# EAGLE board SparkFun_RedStick-ProtoPanel-v01 (EAGLE 7.4.0), part 1 of 4
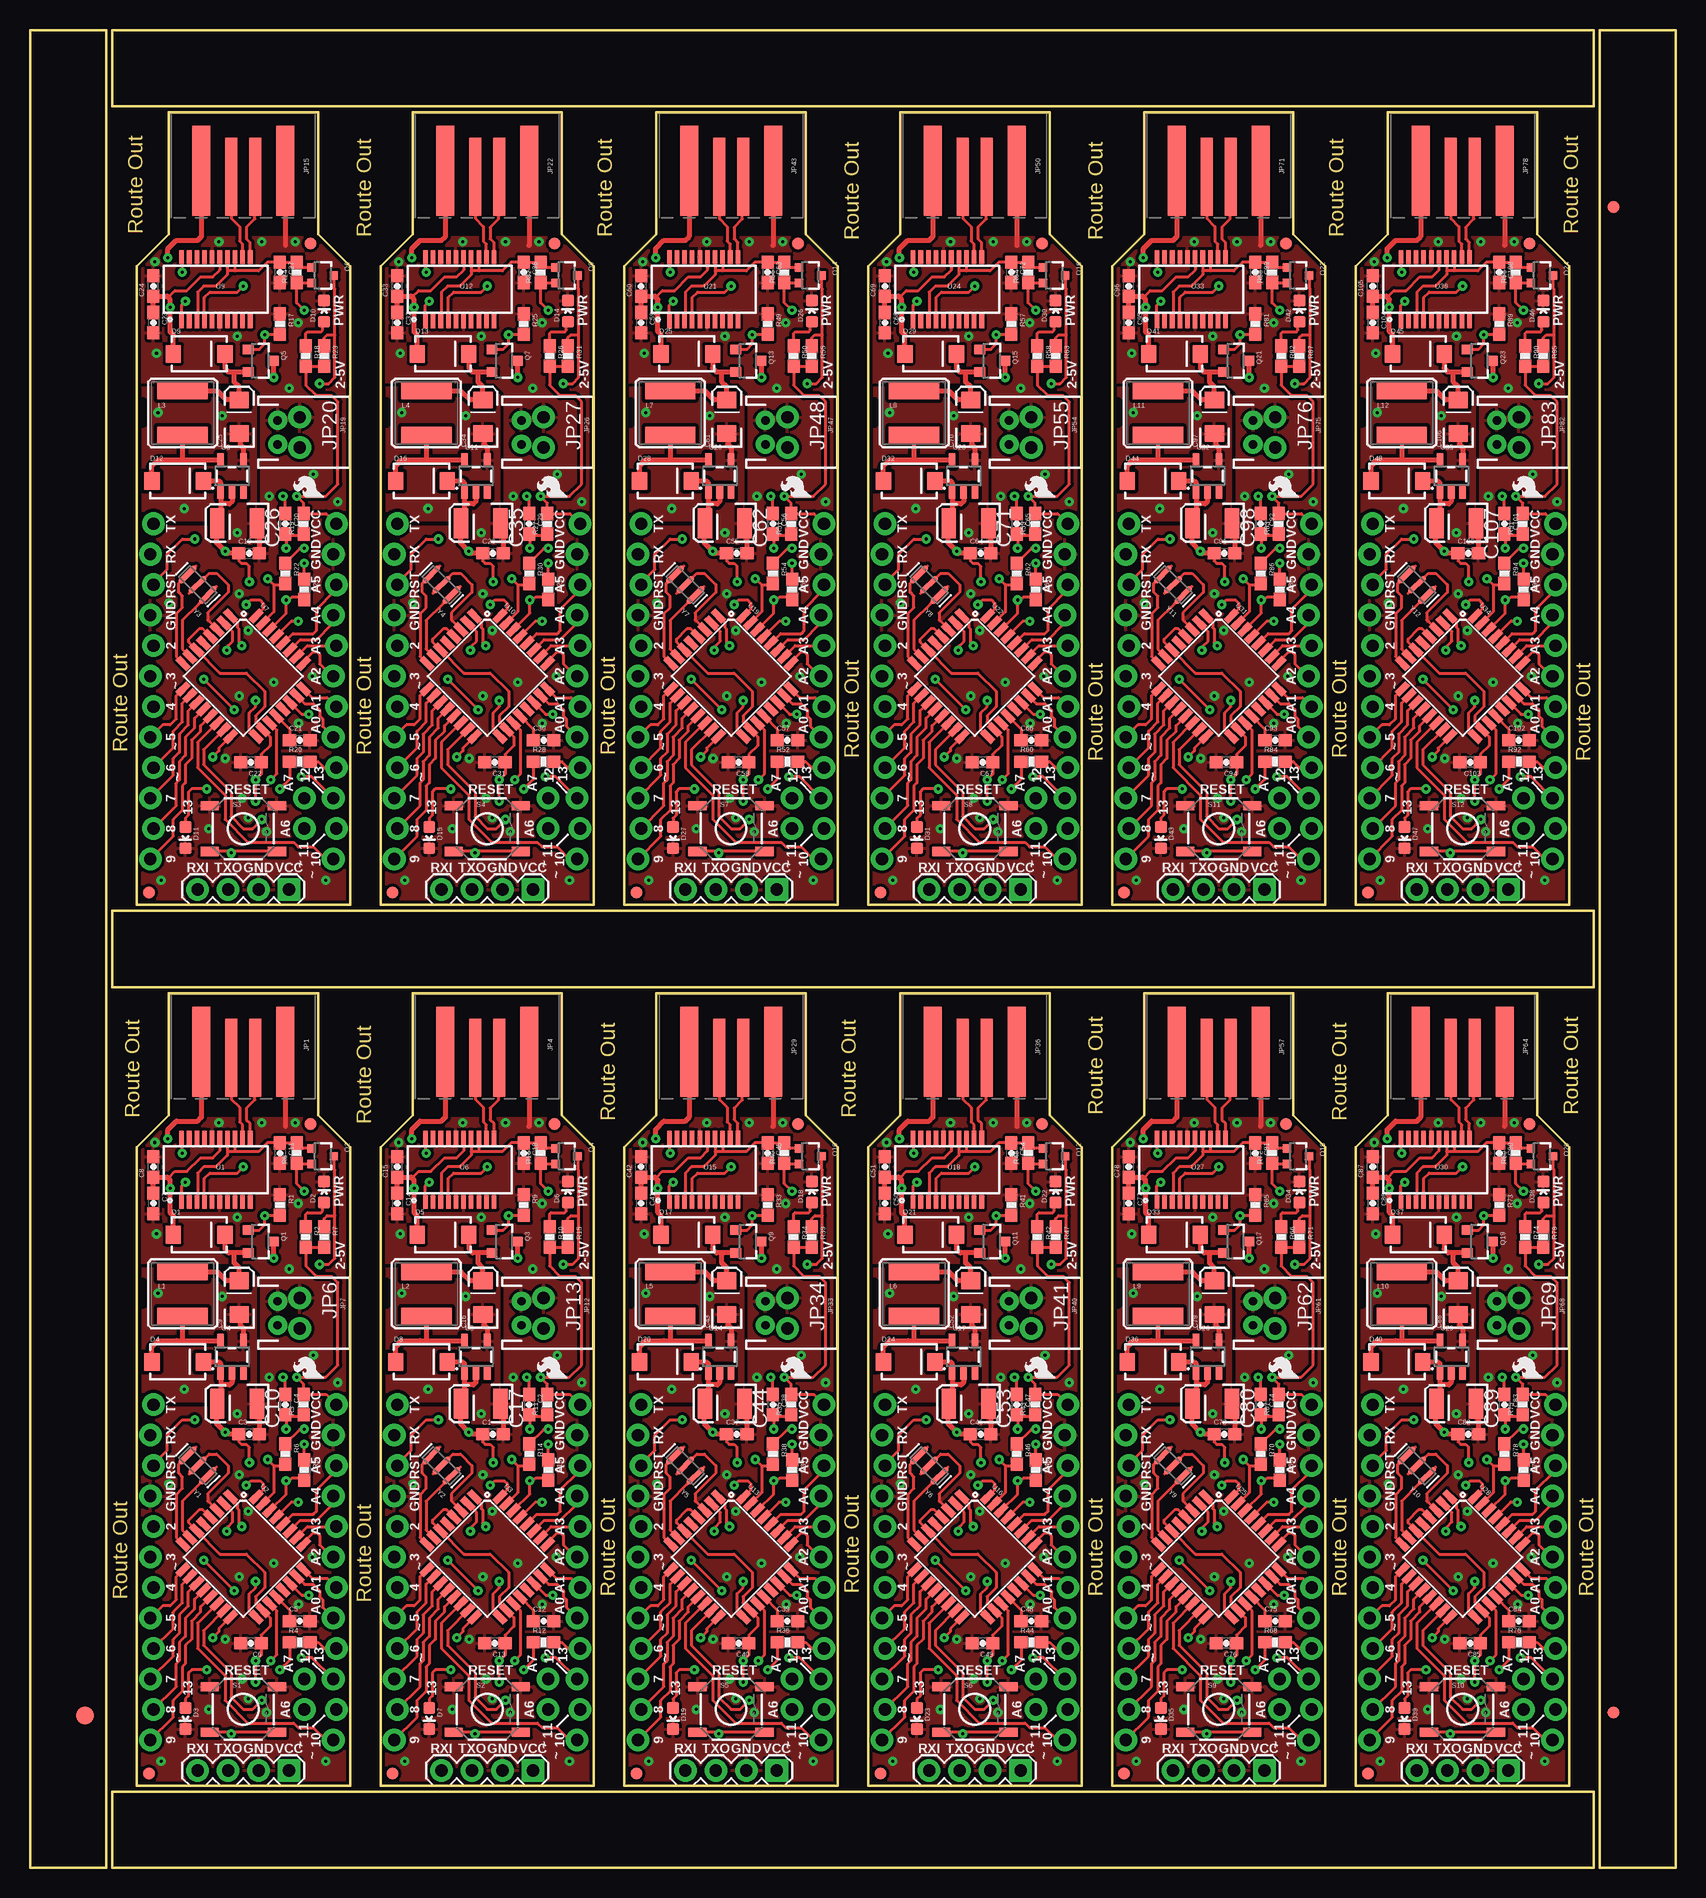
[diagram p0: board, top side]
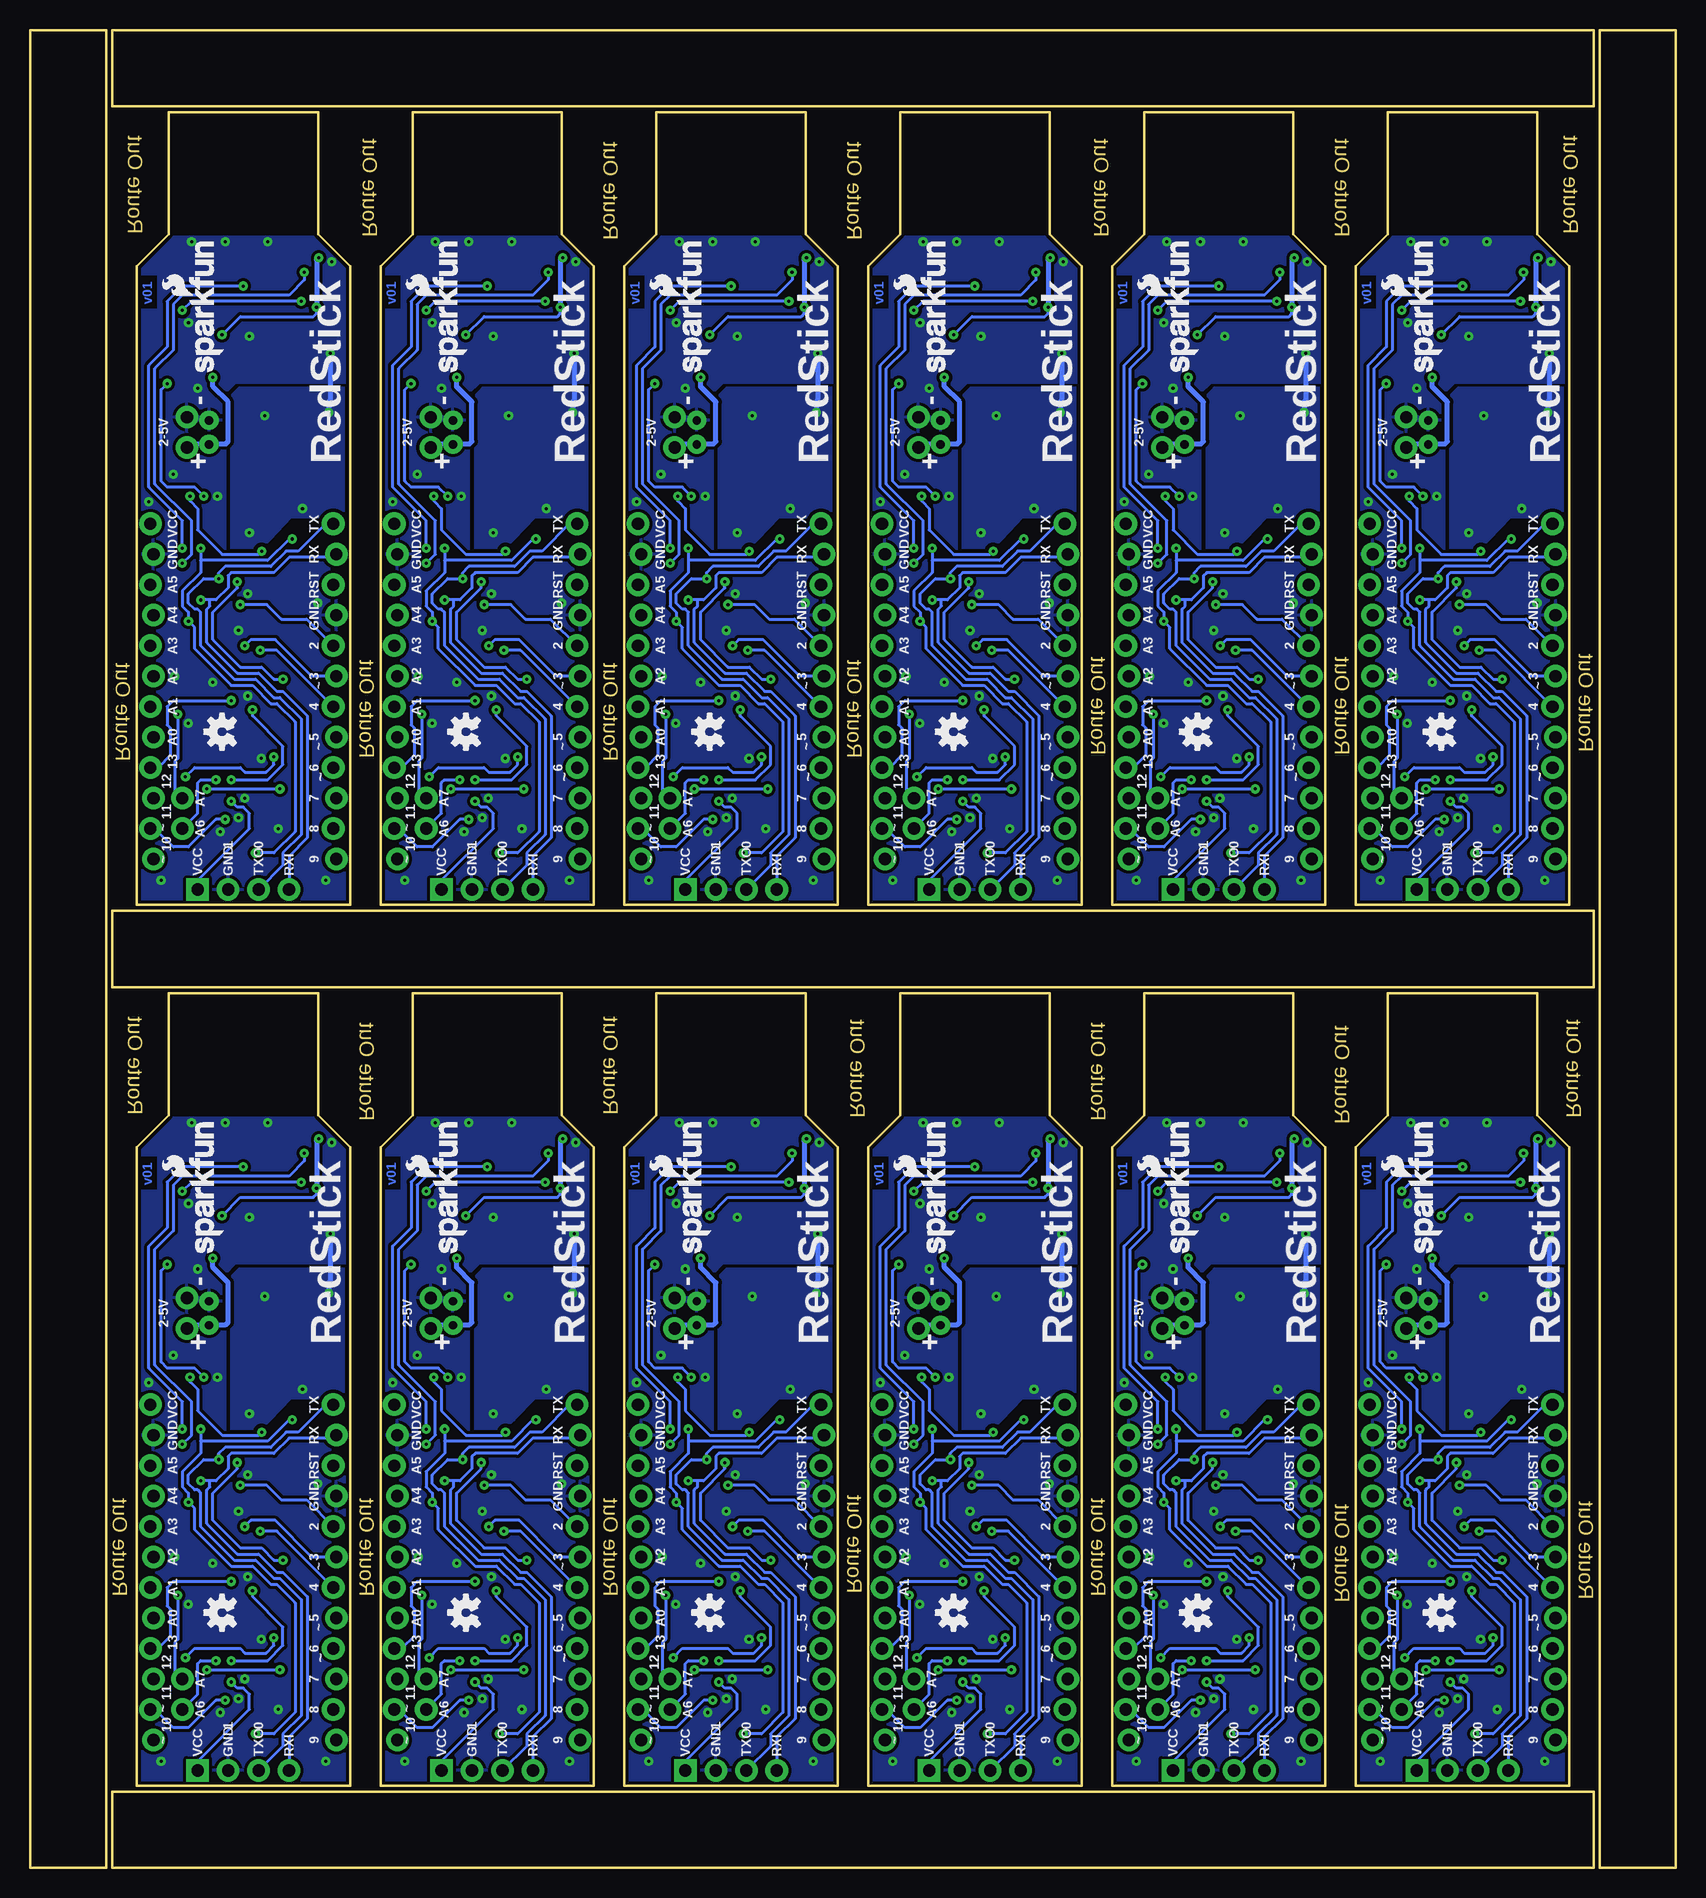
[diagram p1: board, bottom side, seen from below]

Size 137.16 x 153.16 mm. Coordinates in mm from the lower left corner, seen from the top.
Outline: 83.82,73.41 6.86,73.41 6.86,79.76 34.29,79.76
Outline: 31.75,79.76 130.3,79.76 130.3,73.41 81.28,73.41
Outline: 6.35,79.25 6.35,0 0,0 0,29.72
Outline: 0,27.18 0,153.16 6.35,153.16 6.35,76.71
Outline: 81.28,0 6.86,0 6.86,6.35 31.75,6.35
Outline: 29.21,6.35 130.3,6.35 130.3,0 78.74,0
Outline: 137.16,79.25 137.16,0 130.81,0 130.81,29.72
Outline: 130.81,27.18 130.81,153.16 137.16,153.16 137.16,76.71
Outline: 53.09,153.16 130.3,153.16 130.3,146.81 102.62,146.81
Outline: 105.16,146.81 6.86,146.81 6.86,153.16 55.63,153.16
Outline: 8.89,6.86 26.67,6.86 26.67,60.07 24,62.74 24,72.9 11.56,72.9 11.56,62.74 8.89,60.07 8.89,6.86
Outline: 29.21,6.86 46.99,6.86 46.99,60.07 44.32,62.74 44.32,72.9 31.88,72.9 31.88,62.74 29.21,60.07 29.21,6.86
Outline: 8.89,80.26 26.67,80.26 26.67,133.48 24,136.14 24,146.3 11.56,146.3 11.56,136.14 8.89,133.48 8.89,80.26
Outline: 29.21,80.26 46.99,80.26 46.99,133.48 44.32,136.14 44.32,146.3 31.88,146.3 31.88,136.14 29.21,133.48 29.21,80.26
Outline: 49.53,6.86 67.31,6.86 67.31,60.07 64.64,62.74 64.64,72.9 52.2,72.9 52.2,62.74 49.53,60.07 49.53,6.86
Outline: 69.85,6.86 87.63,6.86 87.63,60.07 84.96,62.74 84.96,72.9 72.52,72.9 72.52,62.74 69.85,60.07 69.85,6.86
Outline: 49.53,80.26 67.31,80.26 67.31,133.48 64.64,136.14 64.64,146.3 52.2,146.3 52.2,136.14 49.53,133.48 49.53,80.26
Outline: 69.85,80.26 87.63,80.26 87.63,133.48 84.96,136.14 84.96,146.3 72.52,146.3 72.52,136.14 69.85,133.48 69.85,80.26
Outline: 90.17,6.86 107.95,6.86 107.95,60.07 105.28,62.74 105.28,72.9 92.84,72.9 92.84,62.74 90.17,60.07 90.17,6.86
Outline: 110.49,6.86 128.27,6.86 128.27,60.07 125.6,62.74 125.6,72.9 113.16,72.9 113.16,62.74 110.49,60.07 110.49,6.86
Outline: 90.17,80.26 107.95,80.26 107.95,133.48 105.28,136.14 105.28,146.3 92.84,146.3 92.84,136.14 90.17,133.48 90.17,80.26
Outline: 110.49,80.26 128.27,80.26 128.27,133.48 125.6,136.14 125.6,146.3 113.16,146.3 113.16,136.14 110.49,133.48 110.49,80.26
Copper layers (1*16): Top 0.035mm / dielectric 1.5mm / Bottom 0.035mm
Design rules "SparkFun-2-layer": minimum track width 7mil, minimum drill 15mil, track to track 8mil, track to pad 8mil, pad to pad 8mil, via to via 8mil, smd to smd 8mil, copper to edge 8mil, drill to drill 8mil, minimum pad ring 12mil, minimum via ring 10mil, stop-mask expansion 4mil, vias tented up to drill 20mil, thermal gap 10mil
tRestrict: 72 lines

## Footprints (pad centres in the part's own frame; a part is rotated, then mirrored left to right if it is on the bottom)
0603-CAP = smd 1.1 x 1: 1 -0.85,0; 2 0.85,0
EIA3216 = smd 1.4 x 1.6: A 1.4,0; C -1.4,0
EIA3528 = smd 1.2 x 2.5: A 1.65,0; C -1.65,0
SMA-DIODE = smd 1.27 x 1.47: A -2.15,0; C 2.15,0
LED-0603 = smd 1 x 1: A 0,-0.877; C 0,0.877
FIDUCIAL-1.5X3 = smd 1.5 x 1.5: 1 0,0
FIDUCIAL-1X2 = smd 1 x 1: 1 0,0
USB-A-PCB-NOPASTE = smd 7.5 x 1.5: 5V -0.2,-3.5; GND -0.2,3.5 | smd 6.5 x 1: USB_M 0.3,-1; USB_P 0.3,1
1X12_LOCK_NO_SILK = drill 1.016 pad 1.88: 1 0,0.127; 2 2.54,-0.127; 3 5.08,0.127; 4 7.62,-0.127; 5 10.16,0.127; 6 12.7,-0.127; 7 15.24,0.127; 8 17.78,-0.127; 9 20.32,0.127; 10 22.86,-0.127; 11 25.4,0.127; 12 27.94,-0.127
1X02_NO_SILK = drill 1.016 pad 1.88: 1 0,0; 2 2.54,0
JST-2-PTH = drill 0.7 pad 1.6: 1 -1,0; 2 1,0
1X04 = drill 1.016 pad 1.88 square: 1 0,0 | drill 1.016 pad 1.88: 2 2.54,0; 3 5.08,0; 4 7.62,0
CR54 = smd 4.2 x 1.4: P$1 0,1.85; P$2 0,-1.85
SOT23-3 = smd 0.8 x 0.9: 1 -0.95,-1; 2 0.95,-1; 3 0,1.1
SOT323 = smd 0.7 x 0.7: 1 -0.65,-0.925; 2 0.65,-0.925; 3 0,0.925
0603-RES = smd 1.1 x 1: 1 -0.85,0; 2 0.85,0
TACTILE-SWITCH-SMD = smd 1.524 x 0.762: 1 -2.794,1.905; 2 2.794,1.905; 3 -2.794,-1.905; 4 2.794,-1.905
SSOP20_L = smd 0.381 x 1.143: 1 -2.857,-2.68; 2 -2.223,-2.68; 3 -1.587,-2.68; 4 -0.953,-2.68; 5 -0.318,-2.68; 6 0.318,-2.68; 7 0.953,-2.68; 8 1.587,-2.68; 9 2.223,-2.68; 10 2.857,-2.68; 11 2.857,2.68; 12 2.223,2.68; 13 1.587,2.68; 14 0.953,2.68; 15 0.318,2.68; 16 -0.318,2.68; 17 -0.953,2.68; 18 -1.587,2.68; 19 -2.223,2.68; 20 -2.857,2.68
TQFP32-08 = smd 1.27 x 0.559: 1 -4.293,2.8; 2 -4.293,2; 3 -4.293,1.2; 4 -4.293,0.4; 5 -4.293,-0.4; 6 -4.293,-1.2; 7 -4.293,-2; 8 -4.293,-2.8; 17 4.293,-2.8; 18 4.293,-2; 19 4.293,-1.2; 20 4.293,-0.4; 21 4.293,0.4; 22 4.293,1.2; 23 4.293,2; 24 4.293,2.8 | smd 0.559 x 1.27: 9 -2.8,-4.293; 10 -2,-4.293; 11 -1.2,-4.293; 12 -0.4,-4.293; 13 0.4,-4.293; 14 1.2,-4.293; 15 2,-4.293; 16 2.8,-4.293; 25 2.8,4.293; 26 2,4.293; 27 1.2,4.293; 28 0.4,4.293; 29 -0.4,4.293; 30 -1.2,4.293; 31 -2,4.293; 32 -2.8,4.293
SOT23-5 = smd 0.55 x 1.2: 1 -0.95,-1.3; 2 0,-1.3; 3 0.95,-1.3; 4 0.95,1.3; 5 -0.95,1.3
RESONATOR-SMD = smd 0.45 x 1.905: 1 -1.2,0; 2 0,0; 3 1.2,0

## Placement (x,y rotation side)
C1  0.1uF  [0603-CAP]  38.58,36.15 0 top
C2  0.1uF  [0603-CAP]  41.59,38.61 270 top
C3  0.1uF  [0603-CAP]  18.26,36.15 0 top
C4  0.1uF  [0603-CAP]  21.27,38.61 270 top
C5  0.1uF  [0603-CAP]  22.48,20.57 0 top
C6  0.1uF  [0603-CAP]  18.41,18.73 180 top
C7  0.1uF  [0603-CAP]  10.29,55.37 270 top
C8  0.1uF  [0603-CAP]  10.29,58.42 90 top
C9  10uF  [EIA3216]  17.43,47.53 90 top
C10  68uF  [EIA3528]  17.25,38.67 180 top
C11  0.1uF  [0603-CAP]  20.83,59.56 270 top
C12  0.1uF  [0603-CAP]  42.8,20.57 0 top
C13  0.1uF  [0603-CAP]  38.73,18.73 180 top
C14  0.1uF  [0603-CAP]  30.61,55.37 270 top
C15  0.1uF  [0603-CAP]  30.61,58.42 90 top
C16  10uF  [EIA3216]  37.75,47.53 90 top
C17  68uF  [EIA3528]  37.57,38.67 180 top
C18  0.1uF  [0603-CAP]  41.15,59.56 270 top
C19  0.1uF  [0603-CAP]  18.26,109.55 0 top
C20  0.1uF  [0603-CAP]  21.27,112.01 270 top
C21  0.1uF  [0603-CAP]  22.48,93.98 0 top
C22  0.1uF  [0603-CAP]  18.41,92.14 180 top
C23  0.1uF  [0603-CAP]  10.29,128.78 270 top
C24  0.1uF  [0603-CAP]  10.29,131.83 90 top
C25  10uF  [EIA3216]  17.43,120.93 90 top
C26  68uF  [EIA3528]  17.25,112.08 180 top
C27  0.1uF  [0603-CAP]  20.83,132.97 270 top
C28  0.1uF  [0603-CAP]  38.58,109.55 0 top
C29  0.1uF  [0603-CAP]  41.59,112.01 270 top
C30  0.1uF  [0603-CAP]  42.8,93.98 0 top
C31  0.1uF  [0603-CAP]  38.73,92.14 180 top
C32  0.1uF  [0603-CAP]  30.61,128.78 270 top
C33  0.1uF  [0603-CAP]  30.61,131.83 90 top
C34  10uF  [EIA3216]  37.75,120.93 90 top
C35  68uF  [EIA3528]  37.57,112.08 180 top
C36  0.1uF  [0603-CAP]  41.15,132.97 270 top
C37  0.1uF  [0603-CAP]  58.9,36.15 0 top
C38  0.1uF  [0603-CAP]  61.91,38.61 270 top
C39  0.1uF  [0603-CAP]  63.12,20.57 0 top
C40  0.1uF  [0603-CAP]  59.05,18.73 180 top
C41  0.1uF  [0603-CAP]  50.93,55.37 270 top
C42  0.1uF  [0603-CAP]  50.93,58.42 90 top
C43  10uF  [EIA3216]  58.07,47.53 90 top
C44  68uF  [EIA3528]  57.89,38.67 180 top
C45  0.1uF  [0603-CAP]  61.47,59.56 270 top
C46  0.1uF  [0603-CAP]  79.22,36.15 0 top
C47  0.1uF  [0603-CAP]  82.23,38.61 270 top
C48  0.1uF  [0603-CAP]  83.44,20.57 0 top
C49  0.1uF  [0603-CAP]  79.38,18.73 180 top
C50  0.1uF  [0603-CAP]  71.25,55.37 270 top
C51  0.1uF  [0603-CAP]  71.25,58.42 90 top
C52  10uF  [EIA3216]  78.39,47.53 90 top
C53  68uF  [EIA3528]  78.21,38.67 180 top
C54  0.1uF  [0603-CAP]  81.79,59.56 270 top
C55  0.1uF  [0603-CAP]  58.9,109.55 0 top
C56  0.1uF  [0603-CAP]  61.91,112.01 270 top
C57  0.1uF  [0603-CAP]  63.12,93.98 0 top
C58  0.1uF  [0603-CAP]  59.05,92.14 180 top
C59  0.1uF  [0603-CAP]  50.93,128.78 270 top
C60  0.1uF  [0603-CAP]  50.93,131.83 90 top
C61  10uF  [EIA3216]  58.07,120.93 90 top
C62  68uF  [EIA3528]  57.89,112.08 180 top
C63  0.1uF  [0603-CAP]  61.47,132.97 270 top
C64  0.1uF  [0603-CAP]  79.22,109.55 0 top
C65  0.1uF  [0603-CAP]  82.23,112.01 270 top
C66  0.1uF  [0603-CAP]  83.44,93.98 0 top
C67  0.1uF  [0603-CAP]  79.38,92.14 180 top
C68  0.1uF  [0603-CAP]  71.25,128.78 270 top
C69  0.1uF  [0603-CAP]  71.25,131.83 90 top
C70  10uF  [EIA3216]  78.39,120.93 90 top
C71  68uF  [EIA3528]  78.21,112.08 180 top
C72  0.1uF  [0603-CAP]  81.79,132.97 270 top
C73  0.1uF  [0603-CAP]  99.54,36.15 0 top
C74  0.1uF  [0603-CAP]  102.55,38.61 270 top
C75  0.1uF  [0603-CAP]  103.76,20.57 0 top
C76  0.1uF  [0603-CAP]  99.69,18.73 180 top
C77  0.1uF  [0603-CAP]  91.57,55.37 270 top
C78  0.1uF  [0603-CAP]  91.57,58.42 90 top
C79  10uF  [EIA3216]  98.71,47.53 90 top
C80  68uF  [EIA3528]  98.53,38.67 180 top
C81  0.1uF  [0603-CAP]  102.11,59.56 270 top
C82  0.1uF  [0603-CAP]  119.86,36.15 0 top
C83  0.1uF  [0603-CAP]  122.87,38.61 270 top
C84  0.1uF  [0603-CAP]  124.08,20.57 0 top
C85  0.1uF  [0603-CAP]  120.02,18.73 180 top
C86  0.1uF  [0603-CAP]  111.89,55.37 270 top
C87  0.1uF  [0603-CAP]  111.89,58.42 90 top
C88  10uF  [EIA3216]  119.03,47.53 90 top
C89  68uF  [EIA3528]  118.85,38.67 180 top
C90  0.1uF  [0603-CAP]  122.43,59.56 270 top
C91  0.1uF  [0603-CAP]  99.54,109.55 0 top
C92  0.1uF  [0603-CAP]  102.55,112.01 270 top
C93  0.1uF  [0603-CAP]  103.76,93.98 0 top
C94  0.1uF  [0603-CAP]  99.69,92.14 180 top
C95  0.1uF  [0603-CAP]  91.57,128.78 270 top
C96  0.1uF  [0603-CAP]  91.57,131.83 90 top
C97  10uF  [EIA3216]  98.71,120.93 90 top
C98  68uF  [EIA3528]  98.53,112.08 180 top
C99  0.1uF  [0603-CAP]  102.11,132.97 270 top
C100  0.1uF  [0603-CAP]  119.86,109.55 0 top
C101  0.1uF  [0603-CAP]  122.87,112.01 270 top
C102  0.1uF  [0603-CAP]  124.08,93.98 0 top
C103  0.1uF  [0603-CAP]  120.02,92.14 180 top
C104  0.1uF  [0603-CAP]  111.89,128.78 270 top
C105  0.1uF  [0603-CAP]  111.89,131.83 90 top
C106  10uF  [EIA3216]  119.03,120.93 90 top
C107  68uF  [EIA3528]  118.85,112.08 180 top
C108  0.1uF  [0603-CAP]  122.43,132.97 270 top
D1  MBRA140  [SMA-DIODE]  14.1,52.77 0 top
D2  RED  [LED-0603]  24.51,56.32 0 top
D3  GREEN  [LED-0603]  12.95,12.45 180 top
D4  MBRA140  [SMA-DIODE]  12.31,42.17 0 top
D5  MBRA140  [SMA-DIODE]  34.42,52.77 0 top
D6  RED  [LED-0603]  44.83,56.32 0 top
D7  GREEN  [LED-0603]  33.27,12.45 180 top
D8  MBRA140  [SMA-DIODE]  32.63,42.17 0 top
D9  MBRA140  [SMA-DIODE]  14.1,126.17 0 top
D10  RED  [LED-0603]  24.51,129.73 0 top
D11  GREEN  [LED-0603]  12.95,85.85 180 top
D12  MBRA140  [SMA-DIODE]  12.31,115.58 0 top
D13  MBRA140  [SMA-DIODE]  34.42,126.17 0 top
D14  RED  [LED-0603]  44.83,129.73 0 top
D15  GREEN  [LED-0603]  33.27,85.85 180 top
D16  MBRA140  [SMA-DIODE]  32.63,115.58 0 top
D17  MBRA140  [SMA-DIODE]  54.74,52.77 0 top
D18  RED  [LED-0603]  65.15,56.32 0 top
D19  GREEN  [LED-0603]  53.59,12.45 180 top
D20  MBRA140  [SMA-DIODE]  52.95,42.17 0 top
D21  MBRA140  [SMA-DIODE]  75.06,52.77 0 top
D22  RED  [LED-0603]  85.47,56.32 0 top
D23  GREEN  [LED-0603]  73.91,12.45 180 top
D24  MBRA140  [SMA-DIODE]  73.27,42.17 0 top
D25  MBRA140  [SMA-DIODE]  54.74,126.17 0 top
D26  RED  [LED-0603]  65.15,129.73 0 top
D27  GREEN  [LED-0603]  53.59,85.85 180 top
D28  MBRA140  [SMA-DIODE]  52.95,115.58 0 top
D29  MBRA140  [SMA-DIODE]  75.06,126.17 0 top
D30  RED  [LED-0603]  85.47,129.73 0 top
D31  GREEN  [LED-0603]  73.91,85.85 180 top
D32  MBRA140  [SMA-DIODE]  73.27,115.58 0 top
D33  MBRA140  [SMA-DIODE]  95.38,52.77 0 top
D34  RED  [LED-0603]  105.79,56.32 0 top
D35  GREEN  [LED-0603]  94.23,12.45 180 top
D36  MBRA140  [SMA-DIODE]  93.59,42.17 0 top
D37  MBRA140  [SMA-DIODE]  115.7,52.77 0 top
D38  RED  [LED-0603]  126.11,56.32 0 top
D39  GREEN  [LED-0603]  114.55,12.45 180 top
D40  MBRA140  [SMA-DIODE]  113.91,42.17 0 top
D41  MBRA140  [SMA-DIODE]  95.38,126.17 0 top
D42  RED  [LED-0603]  105.79,129.73 0 top
D43  GREEN  [LED-0603]  94.23,85.85 180 top
D44  MBRA140  [SMA-DIODE]  93.59,115.58 0 top
D45  MBRA140  [SMA-DIODE]  115.7,126.17 0 top
D46  RED  [LED-0603]  126.11,129.73 0 top
D47  GREEN  [LED-0603]  114.55,85.85 180 top
D48  MBRA140  [SMA-DIODE]  113.91,115.58 0 top
E$1  [FIDUCIAL-1.5X3]  4.57,12.7 0 top
E$7  [FIDUCIAL-1X2]  131.95,12.95 0 top
E$8  [FIDUCIAL-1X2]  131.95,138.43 180 top
FID1  FIDUCIAL1X2  [FIDUCIAL-1X2]  9.91,7.87 0 top
FID2  FIDUCIAL1X2  [FIDUCIAL-1X2]  23.37,61.98 0 top
FID3  FIDUCIAL1X2  [FIDUCIAL-1X2]  30.23,7.87 0 top
FID4  FIDUCIAL1X2  [FIDUCIAL-1X2]  43.69,61.98 0 top
FID5  FIDUCIAL1X2  [FIDUCIAL-1X2]  9.91,81.28 0 top
FID6  FIDUCIAL1X2  [FIDUCIAL-1X2]  23.37,135.38 0 top
FID7  FIDUCIAL1X2  [FIDUCIAL-1X2]  30.23,81.28 0 top
FID8  FIDUCIAL1X2  [FIDUCIAL-1X2]  43.69,135.38 0 top
FID9  FIDUCIAL1X2  [FIDUCIAL-1X2]  50.55,7.87 0 top
FID10  FIDUCIAL1X2  [FIDUCIAL-1X2]  64.01,61.98 0 top
FID11  FIDUCIAL1X2  [FIDUCIAL-1X2]  70.87,7.87 0 top
FID12  FIDUCIAL1X2  [FIDUCIAL-1X2]  84.33,61.98 0 top
FID13  FIDUCIAL1X2  [FIDUCIAL-1X2]  50.55,81.28 0 top
FID14  FIDUCIAL1X2  [FIDUCIAL-1X2]  64.01,135.38 0 top
FID15  FIDUCIAL1X2  [FIDUCIAL-1X2]  70.87,81.28 0 top
FID16  FIDUCIAL1X2  [FIDUCIAL-1X2]  84.33,135.38 0 top
FID17  FIDUCIAL1X2  [FIDUCIAL-1X2]  91.19,7.87 0 top
FID18  FIDUCIAL1X2  [FIDUCIAL-1X2]  104.65,61.98 0 top
FID19  FIDUCIAL1X2  [FIDUCIAL-1X2]  111.51,7.87 0 top
FID20  FIDUCIAL1X2  [FIDUCIAL-1X2]  124.97,61.98 0 top
FID21  FIDUCIAL1X2  [FIDUCIAL-1X2]  91.19,81.28 0 top
FID22  FIDUCIAL1X2  [FIDUCIAL-1X2]  104.65,135.38 0 top
FID23  FIDUCIAL1X2  [FIDUCIAL-1X2]  111.51,81.28 0 top
FID24  FIDUCIAL1X2  [FIDUCIAL-1X2]  124.97,135.38 0 top
JP1  USBPCB_NOPASTE  [USB-A-PCB-NOPASTE]  17.78,67.82 270 top
JP2  DNP  [1X12_LOCK_NO_SILK]  10.16,10.67 90 top
JP3  DNP  [1X12_LOCK_NO_SILK]  25.4,38.61 270 top
JP4  USBPCB_NOPASTE  [USB-A-PCB-NOPASTE]  38.1,67.82 270 top
JP5  M021X02_NO_SILK  [1X02_NO_SILK]  22.86,13.21 90 top
JP6  M021X02_NO_SILK  [1X02_NO_SILK]  22.48,47.5 270 top
JP7  DNP  [JST-2-PTH]  20.64,46.23 270 top
JP8  DNP  [1X04]  21.59,8.13 180 top
JP9  M021X02_NO_SILK  [1X02_NO_SILK]  43.18,13.21 90 top
JP10  DNP  [1X12_LOCK_NO_SILK]  45.72,38.61 270 top
JP11  DNP  [1X12_LOCK_NO_SILK]  30.48,10.67 90 top
JP12  DNP  [JST-2-PTH]  40.96,46.23 270 top
JP13  M021X02_NO_SILK  [1X02_NO_SILK]  42.8,47.5 270 top
JP14  DNP  [1X04]  41.91,8.13 180 top
JP15  USBPCB_NOPASTE  [USB-A-PCB-NOPASTE]  17.78,141.22 270 top
JP16  M021X02_NO_SILK  [1X02_NO_SILK]  22.86,86.61 90 top
JP17  DNP  [1X12_LOCK_NO_SILK]  25.4,112.01 270 top
JP18  DNP  [1X12_LOCK_NO_SILK]  10.16,84.07 90 top
JP19  DNP  [JST-2-PTH]  20.64,119.63 270 top
JP20  M021X02_NO_SILK  [1X02_NO_SILK]  22.48,120.9 270 top
JP21  DNP  [1X04]  21.59,81.53 180 top
JP22  USBPCB_NOPASTE  [USB-A-PCB-NOPASTE]  38.1,141.22 270 top
JP23  M021X02_NO_SILK  [1X02_NO_SILK]  43.18,86.61 90 top
JP24  DNP  [1X12_LOCK_NO_SILK]  45.72,112.01 270 top
JP25  DNP  [1X12_LOCK_NO_SILK]  30.48,84.07 90 top
JP26  DNP  [JST-2-PTH]  40.96,119.63 270 top
JP27  M021X02_NO_SILK  [1X02_NO_SILK]  42.8,120.9 270 top
JP28  DNP  [1X04]  41.91,81.53 180 top
JP29  USBPCB_NOPASTE  [USB-A-PCB-NOPASTE]  58.42,67.82 270 top
JP30  M021X02_NO_SILK  [1X02_NO_SILK]  63.5,13.21 90 top
JP31  DNP  [1X12_LOCK_NO_SILK]  66.04,38.61 270 top
JP32  DNP  [1X12_LOCK_NO_SILK]  50.8,10.67 90 top
JP33  DNP  [JST-2-PTH]  61.28,46.23 270 top
JP34  M021X02_NO_SILK  [1X02_NO_SILK]  63.12,47.5 270 top
JP35  DNP  [1X04]  62.23,8.13 180 top
JP36  USBPCB_NOPASTE  [USB-A-PCB-NOPASTE]  78.74,67.82 270 top
JP37  M021X02_NO_SILK  [1X02_NO_SILK]  83.82,13.21 90 top
JP38  DNP  [1X12_LOCK_NO_SILK]  86.36,38.61 270 top
JP39  DNP  [1X12_LOCK_NO_SILK]  71.12,10.67 90 top
JP40  DNP  [JST-2-PTH]  81.6,46.23 270 top
JP41  M021X02_NO_SILK  [1X02_NO_SILK]  83.44,47.5 270 top
JP42  DNP  [1X04]  82.55,8.13 180 top
JP43  USBPCB_NOPASTE  [USB-A-PCB-NOPASTE]  58.42,141.22 270 top
JP44  M021X02_NO_SILK  [1X02_NO_SILK]  63.5,86.61 90 top
JP45  DNP  [1X12_LOCK_NO_SILK]  66.04,112.01 270 top
JP46  DNP  [1X12_LOCK_NO_SILK]  50.8,84.07 90 top
JP47  DNP  [JST-2-PTH]  61.28,119.63 270 top
JP48  M021X02_NO_SILK  [1X02_NO_SILK]  63.12,120.9 270 top
JP49  DNP  [1X04]  62.23,81.53 180 top
JP50  USBPCB_NOPASTE  [USB-A-PCB-NOPASTE]  78.74,141.22 270 top
JP51  M021X02_NO_SILK  [1X02_NO_SILK]  83.82,86.61 90 top
JP52  DNP  [1X12_LOCK_NO_SILK]  86.36,112.01 270 top
JP53  DNP  [1X12_LOCK_NO_SILK]  71.12,84.07 90 top
JP54  DNP  [JST-2-PTH]  81.6,119.63 270 top
JP55  M021X02_NO_SILK  [1X02_NO_SILK]  83.44,120.9 270 top
JP56  DNP  [1X04]  82.55,81.53 180 top
JP57  USBPCB_NOPASTE  [USB-A-PCB-NOPASTE]  99.06,67.82 270 top
JP58  M021X02_NO_SILK  [1X02_NO_SILK]  104.14,13.21 90 top
JP59  DNP  [1X12_LOCK_NO_SILK]  106.68,38.61 270 top
JP60  DNP  [1X12_LOCK_NO_SILK]  91.44,10.67 90 top
JP61  DNP  [JST-2-PTH]  101.92,46.23 270 top
JP62  M021X02_NO_SILK  [1X02_NO_SILK]  103.76,47.5 270 top
JP63  DNP  [1X04]  102.87,8.13 180 top
JP64  USBPCB_NOPASTE  [USB-A-PCB-NOPASTE]  119.38,67.82 270 top
JP65  M021X02_NO_SILK  [1X02_NO_SILK]  124.46,13.21 90 top
JP66  DNP  [1X12_LOCK_NO_SILK]  127,38.61 270 top
JP67  DNP  [1X12_LOCK_NO_SILK]  111.76,10.67 90 top
JP68  DNP  [JST-2-PTH]  122.24,46.23 270 top
JP69  M021X02_NO_SILK  [1X02_NO_SILK]  124.08,47.5 270 top
JP70  DNP  [1X04]  123.19,8.13 180 top
JP71  USBPCB_NOPASTE  [USB-A-PCB-NOPASTE]  99.06,141.22 270 top
JP72  M021X02_NO_SILK  [1X02_NO_SILK]  104.14,86.61 90 top
JP73  DNP  [1X12_LOCK_NO_SILK]  106.68,112.01 270 top
JP74  DNP  [1X12_LOCK_NO_SILK]  91.44,84.07 90 top
JP75  DNP  [JST-2-PTH]  101.92,119.63 270 top
JP76  M021X02_NO_SILK  [1X02_NO_SILK]  103.76,120.9 270 top
JP77  DNP  [1X04]  102.87,81.53 180 top
JP78  USBPCB_NOPASTE  [USB-A-PCB-NOPASTE]  119.38,141.22 270 top
JP79  M021X02_NO_SILK  [1X02_NO_SILK]  124.46,86.61 90 top
JP80  DNP  [1X12_LOCK_NO_SILK]  127,112.01 270 top
JP81  DNP  [1X12_LOCK_NO_SILK]  111.76,84.07 90 top
JP82  DNP  [JST-2-PTH]  122.24,119.63 270 top
JP83  M021X02_NO_SILK  [1X02_NO_SILK]  124.08,120.9 270 top
JP84  DNP  [1X04]  123.19,81.53 180 top
L1  47uH  [CR54]  12.72,47.84 0 top
L2  47uH  [CR54]  33.04,47.84 0 top
L3  47uH  [CR54]  12.72,121.24 0 top
L4  47uH  [CR54]  33.04,121.24 0 top
L5  47uH  [CR54]  53.36,47.84 0 top
L6  47uH  [CR54]  73.68,47.84 0 top
L7  47uH  [CR54]  53.36,121.24 0 top
L8  47uH  [CR54]  73.68,121.24 0 top
L9  47uH  [CR54]  94,47.84 0 top
L10  47uH  [CR54]  114.32,47.84 0 top
L11  47uH  [CR54]  94,121.24 0 top
L12  47uH  [CR54]  114.32,121.24 0 top
LOGO1  SFE_LOGO_FLAME.1_INCH  [SFE_LOGO_FLAME_.1]  24.83,40.54 90 top
LOGO2  OSHW-LOGOS  [OSHW-LOGO-S]  19.56,21.27 90 bottom
LOGO3  SFE_LOGO_FLAME.1_INCH  [SFE_LOGO_FLAME_.1]  45.15,40.54 90 top
LOGO4  OSHW-LOGOS  [OSHW-LOGO-S]  39.88,21.27 90 bottom
LOGO5  SFE_LOGO_FLAME.1_INCH  [SFE_LOGO_FLAME_.1]  24.83,113.94 90 top
LOGO6  OSHW-LOGOS  [OSHW-LOGO-S]  19.56,94.68 90 bottom
LOGO7  SFE_LOGO_FLAME.1_INCH  [SFE_LOGO_FLAME_.1]  45.15,113.94 90 top
LOGO8  OSHW-LOGOS  [OSHW-LOGO-S]  39.88,94.68 90 bottom
LOGO9  SFE_LOGO_FLAME.1_INCH  [SFE_LOGO_FLAME_.1]  65.47,40.54 90 top
LOGO10  OSHW-LOGOS  [OSHW-LOGO-S]  60.2,21.27 90 bottom
LOGO11  SFE_LOGO_FLAME.1_INCH  [SFE_LOGO_FLAME_.1]  85.79,40.54 90 top
LOGO12  OSHW-LOGOS  [OSHW-LOGO-S]  80.52,21.27 90 bottom
LOGO13  SFE_LOGO_FLAME.1_INCH  [SFE_LOGO_FLAME_.1]  65.47,113.94 90 top
LOGO14  OSHW-LOGOS  [OSHW-LOGO-S]  60.2,94.68 90 bottom
LOGO15  SFE_LOGO_FLAME.1_INCH  [SFE_LOGO_FLAME_.1]  85.79,113.94 90 top
LOGO16  OSHW-LOGOS  [OSHW-LOGO-S]  80.52,94.68 90 bottom
LOGO17  SFE_LOGO_FLAME.1_INCH  [SFE_LOGO_FLAME_.1]  106.11,40.54 90 top
LOGO18  OSHW-LOGOS  [OSHW-LOGO-S]  100.84,21.27 90 bottom
LOGO19  SFE_LOGO_FLAME.1_INCH  [SFE_LOGO_FLAME_.1]  126.43,40.54 90 top
LOGO20  OSHW-LOGOS  [OSHW-LOGO-S]  121.16,21.27 90 bottom
LOGO21  SFE_LOGO_FLAME.1_INCH  [SFE_LOGO_FLAME_.1]  106.11,113.94 90 top
LOGO22  OSHW-LOGOS  [OSHW-LOGO-S]  100.84,94.68 90 bottom
LOGO23  SFE_LOGO_FLAME.1_INCH  [SFE_LOGO_FLAME_.1]  126.43,113.94 90 top
LOGO24  OSHW-LOGOS  [OSHW-LOGO-S]  121.16,94.68 90 bottom
Q1  DMG2307L  [SOT23-3]  19.18,52.2 270 top
Q2  MOSFET-NCHANNEL2N7002PW  [SOT323]  24.38,59.31 270 top
Q3  DMG2307L  [SOT23-3]  39.5,52.2 270 top
Q4  MOSFET-NCHANNEL2N7002PW  [SOT323]  44.7,59.31 270 top
Q5  DMG2307L  [SOT23-3]  19.18,125.6 270 top
Q6  MOSFET-NCHANNEL2N7002PW  [SOT323]  24.38,132.72 270 top
Q7  DMG2307L  [SOT23-3]  39.5,125.6 270 top
Q8  MOSFET-NCHANNEL2N7002PW  [SOT323]  44.7,132.72 270 top
Q9  DMG2307L  [SOT23-3]  59.82,52.2 270 top
Q10  MOSFET-NCHANNEL2N7002PW  [SOT323]  65.02,59.31 270 top
Q11  DMG2307L  [SOT23-3]  80.14,52.2 270 top
Q12  MOSFET-NCHANNEL2N7002PW  [SOT323]  85.34,59.31 270 top
Q13  DMG2307L  [SOT23-3]  59.82,125.6 270 top
Q14  MOSFET-NCHANNEL2N7002PW  [SOT323]  65.02,132.72 270 top
Q15  DMG2307L  [SOT23-3]  80.14,125.6 270 top
Q16  MOSFET-NCHANNEL2N7002PW  [SOT323]  85.34,132.72 270 top
Q17  DMG2307L  [SOT23-3]  100.46,52.2 270 top
Q18  MOSFET-NCHANNEL2N7002PW  [SOT323]  105.66,59.31 270 top
Q19  DMG2307L  [SOT23-3]  120.78,52.2 270 top
Q20  MOSFET-NCHANNEL2N7002PW  [SOT323]  125.98,59.31 270 top
Q21  DMG2307L  [SOT23-3]  100.46,125.6 270 top
Q22  MOSFET-NCHANNEL2N7002PW  [SOT323]  105.66,132.72 270 top
Q23  DMG2307L  [SOT23-3]  120.78,125.6 270 top
Q24  MOSFET-NCHANNEL2N7002PW  [SOT323]  125.98,132.72 270 top
R1  100k  [0603-RES]  20.83,55.24 270 top
R2  10K  [0603-RES]  22.99,52.58 270 top
R3  10K  [0603-RES]  22.8,38.61 90 top
R4  330  [0603-RES]  22.48,18.8 0 top
R5  1K  [0603-RES]  22.86,33.15 270 top
R6  1K  [0603-RES]  21.27,34.48 270 top
R7  10K  [0603-RES]  24.51,52.58 270 top
R8  10K  [0603-RES]  22.23,59.56 90 top
R9  100k  [0603-RES]  41.15,55.24 270 top
R10  10K  [0603-RES]  43.31,52.58 270 top
R11  10K  [0603-RES]  43.12,38.61 90 top
R12  330  [0603-RES]  42.8,18.8 0 top
R13  1K  [0603-RES]  43.18,33.15 270 top
R14  1K  [0603-RES]  41.59,34.48 270 top
R15  10K  [0603-RES]  44.83,52.58 270 top
R16  10K  [0603-RES]  42.55,59.56 90 top
R17  100k  [0603-RES]  20.83,128.65 270 top
R18  10K  [0603-RES]  22.99,125.98 270 top
R19  10K  [0603-RES]  22.8,112.01 90 top
R20  330  [0603-RES]  22.48,92.2 0 top
R21  1K  [0603-RES]  22.86,106.55 270 top
R22  1K  [0603-RES]  21.27,107.89 270 top
R23  10K  [0603-RES]  24.51,125.98 270 top
R24  10K  [0603-RES]  22.23,132.97 90 top
R25  100k  [0603-RES]  41.15,128.65 270 top
R26  10K  [0603-RES]  43.31,125.98 270 top
R27  10K  [0603-RES]  43.12,112.01 90 top
R28  330  [0603-RES]  42.8,92.2 0 top
R29  1K  [0603-RES]  43.18,106.55 270 top
R30  1K  [0603-RES]  41.59,107.89 270 top
R31  10K  [0603-RES]  44.83,125.98 270 top
R32  10K  [0603-RES]  42.55,132.97 90 top
R33  100k  [0603-RES]  61.47,55.24 270 top
R34  10K  [0603-RES]  63.63,52.58 270 top
R35  10K  [0603-RES]  63.44,38.61 90 top
R36  330  [0603-RES]  63.12,18.8 0 top
R37  1K  [0603-RES]  63.5,33.15 270 top
R38  1K  [0603-RES]  61.91,34.48 270 top
R39  10K  [0603-RES]  65.15,52.58 270 top
R40  10K  [0603-RES]  62.87,59.56 90 top
R41  100k  [0603-RES]  81.79,55.24 270 top
R42  10K  [0603-RES]  83.95,52.58 270 top
R43  10K  [0603-RES]  83.76,38.61 90 top
R44  330  [0603-RES]  83.44,18.8 0 top
R45  1K  [0603-RES]  83.82,33.15 270 top
R46  1K  [0603-RES]  82.23,34.48 270 top
R47  10K  [0603-RES]  85.47,52.58 270 top
R48  10K  [0603-RES]  83.19,59.56 90 top
R49  100k  [0603-RES]  61.47,128.65 270 top
R50  10K  [0603-RES]  63.63,125.98 270 top
R51  10K  [0603-RES]  63.44,112.01 90 top
R52  330  [0603-RES]  63.12,92.2 0 top
R53  1K  [0603-RES]  63.5,106.55 270 top
R54  1K  [0603-RES]  61.91,107.89 270 top
R55  10K  [0603-RES]  65.15,125.98 270 top
R56  10K  [0603-RES]  62.87,132.97 90 top
R57  100k  [0603-RES]  81.79,128.65 270 top
R58  10K  [0603-RES]  83.95,125.98 270 top
R59  10K  [0603-RES]  83.76,112.01 90 top
R60  330  [0603-RES]  83.44,92.2 0 top
R61  1K  [0603-RES]  83.82,106.55 270 top
R62  1K  [0603-RES]  82.23,107.89 270 top
R63  10K  [0603-RES]  85.47,125.98 270 top
R64  10K  [0603-RES]  83.19,132.97 90 top
R65  100k  [0603-RES]  102.11,55.24 270 top
R66  10K  [0603-RES]  104.27,52.58 270 top
R67  10K  [0603-RES]  104.08,38.61 90 top
R68  330  [0603-RES]  103.76,18.8 0 top
R69  1K  [0603-RES]  104.14,33.15 270 top
R70  1K  [0603-RES]  102.55,34.48 270 top
R71  10K  [0603-RES]  105.79,52.58 270 top
R72  10K  [0603-RES]  103.5,59.56 90 top
R73  100k  [0603-RES]  122.43,55.24 270 top
R74  10K  [0603-RES]  124.59,52.58 270 top
R75  10K  [0603-RES]  124.4,38.61 90 top
R76  330  [0603-RES]  124.08,18.8 0 top
R77  1K  [0603-RES]  124.46,33.15 270 top
R78  1K  [0603-RES]  122.87,34.48 270 top
R79  10K  [0603-RES]  126.11,52.58 270 top
R80  10K  [0603-RES]  123.83,59.56 90 top
R81  100k  [0603-RES]  102.11,128.65 270 top
R82  10K  [0603-RES]  104.27,125.98 270 top
R83  10K  [0603-RES]  104.08,112.01 90 top
R84  330  [0603-RES]  103.76,92.2 0 top
R85  1K  [0603-RES]  104.14,106.55 270 top
R86  1K  [0603-RES]  102.55,107.89 270 top
R87  10K  [0603-RES]  105.79,125.98 270 top
R88  10K  [0603-RES]  103.5,132.97 90 top
R89  100k  [0603-RES]  122.43,128.65 270 top
R90  10K  [0603-RES]  124.59,125.98 270 top
R91  10K  [0603-RES]  124.4,112.01 90 top
R92  330  [0603-RES]  124.08,92.2 0 top
R93  1K  [0603-RES]  124.46,106.55 270 top
R94  1K  [0603-RES]  122.87,107.89 270 top
R95  10K  [0603-RES]  126.11,125.98 270 top
R96  10K  [0603-RES]  123.83,132.97 90 top
S1  SWITCH-MOMENTARY-2SMD-REDUNDANT  [TACTILE-SWITCH-SMD]  17.78,13.21 0 top
S2  SWITCH-MOMENTARY-2SMD-REDUNDANT  [TACTILE-SWITCH-SMD]  38.1,13.21 0 top
S3  SWITCH-MOMENTARY-2SMD-REDUNDANT  [TACTILE-SWITCH-SMD]  17.78,86.61 0 top
S4  SWITCH-MOMENTARY-2SMD-REDUNDANT  [TACTILE-SWITCH-SMD]  38.1,86.61 0 top
S5  SWITCH-MOMENTARY-2SMD-REDUNDANT  [TACTILE-SWITCH-SMD]  58.42,13.21 0 top
S6  SWITCH-MOMENTARY-2SMD-REDUNDANT  [TACTILE-SWITCH-SMD]  78.74,13.21 0 top
S7  SWITCH-MOMENTARY-2SMD-REDUNDANT  [TACTILE-SWITCH-SMD]  58.42,86.61 0 top
S8  SWITCH-MOMENTARY-2SMD-REDUNDANT  [TACTILE-SWITCH-SMD]  78.74,86.61 0 top
S9  SWITCH-MOMENTARY-2SMD-REDUNDANT  [TACTILE-SWITCH-SMD]  99.06,13.21 0 top
S10  SWITCH-MOMENTARY-2SMD-REDUNDANT  [TACTILE-SWITCH-SMD]  119.38,13.21 0 top
S11  SWITCH-MOMENTARY-2SMD-REDUNDANT  [TACTILE-SWITCH-SMD]  99.06,86.61 0 top
S12  SWITCH-MOMENTARY-2SMD-REDUNDANT  [TACTILE-SWITCH-SMD]  119.38,86.61 0 top
U1  FTS31XS-U  [SSOP20_L]  15.49,58.17 0 top
U2  ATMEGA328P_TQFP  [TQFP32-08]  17.78,25.91 315 top
U3  ATMEGA328P_TQFP  [TQFP32-08]  38.1,25.91 315 top
U4  5.0v  [SOT23-5]  16.84,42.6 0 top
U5  5.0v  [SOT23-5]  37.16,42.6 0 top
U6  FTS31XS-U  [SSOP20_L]  35.81,58.17 0 top
U7  ATMEGA328P_TQFP  [TQFP32-08]  17.78,99.31 315 top
U8  5.0v  [SOT23-5]  16.84,116 0 top
U9  FTS31XS-U  [SSOP20_L]  15.49,131.57 0 top
U10  ATMEGA328P_TQFP  [TQFP32-08]  38.1,99.31 315 top
U11  5.0v  [SOT23-5]  37.16,116 0 top
U12  FTS31XS-U  [SSOP20_L]  35.81,131.57 0 top
U13  ATMEGA328P_TQFP  [TQFP32-08]  58.42,25.91 315 top
U14  5.0v  [SOT23-5]  57.48,42.6 0 top
U15  FTS31XS-U  [SSOP20_L]  56.13,58.17 0 top
U16  ATMEGA328P_TQFP  [TQFP32-08]  78.74,25.91 315 top
U17  5.0v  [SOT23-5]  77.8,42.6 0 top
U18  FTS31XS-U  [SSOP20_L]  76.45,58.17 0 top
U19  ATMEGA328P_TQFP  [TQFP32-08]  58.42,99.31 315 top
U20  5.0v  [SOT23-5]  57.48,116 0 top
U21  FTS31XS-U  [SSOP20_L]  56.13,131.57 0 top
U22  ATMEGA328P_TQFP  [TQFP32-08]  78.74,99.31 315 top
U23  5.0v  [SOT23-5]  77.8,116 0 top
U24  FTS31XS-U  [SSOP20_L]  76.45,131.57 0 top
U25  ATMEGA328P_TQFP  [TQFP32-08]  99.06,25.91 315 top
U26  5.0v  [SOT23-5]  98.12,42.6 0 top
U27  FTS31XS-U  [SSOP20_L]  96.77,58.17 0 top
U28  ATMEGA328P_TQFP  [TQFP32-08]  119.38,25.91 315 top
U29  5.0v  [SOT23-5]  118.44,42.6 0 top
U30  FTS31XS-U  [SSOP20_L]  117.09,58.17 0 top
U31  ATMEGA328P_TQFP  [TQFP32-08]  99.06,99.31 315 top
U32  5.0v  [SOT23-5]  98.12,116 0 top
U33  FTS31XS-U  [SSOP20_L]  96.77,131.57 0 top
U34  ATMEGA328P_TQFP  [TQFP32-08]  119.38,99.31 315 top
U35  5.0v  [SOT23-5]  118.44,116 0 top
U36  FTS31XS-U  [SSOP20_L]  117.09,131.57 0 top
U$1  SFE_LOGO_NAME_FLAME.1_INCH  [SFE_LOGO_NAME_FLAME_.1]  19.37,50.8 90 bottom
U$2  SFE_LOGO_NAME_FLAME.1_INCH  [SFE_LOGO_NAME_FLAME_.1]  39.69,50.8 90 bottom
U$3  SFE_LOGO_NAME_FLAME.1_INCH  [SFE_LOGO_NAME_FLAME_.1]  19.37,124.21 90 bottom
U$4  SFE_LOGO_NAME_FLAME.1_INCH  [SFE_LOGO_NAME_FLAME_.1]  39.69,124.21 90 bottom
U$5  SFE_LOGO_NAME_FLAME.1_INCH  [SFE_LOGO_NAME_FLAME_.1]  60.01,50.8 90 bottom
U$6  SFE_LOGO_NAME_FLAME.1_INCH  [SFE_LOGO_NAME_FLAME_.1]  80.33,50.8 90 bottom
U$7  SFE_LOGO_NAME_FLAME.1_INCH  [SFE_LOGO_NAME_FLAME_.1]  60.01,124.21 90 bottom
U$8  SFE_LOGO_NAME_FLAME.1_INCH  [SFE_LOGO_NAME_FLAME_.1]  80.33,124.21 90 bottom
U$9  SFE_LOGO_NAME_FLAME.1_INCH  [SFE_LOGO_NAME_FLAME_.1]  100.65,50.8 90 bottom
U$10  SFE_LOGO_NAME_FLAME.1_INCH  [SFE_LOGO_NAME_FLAME_.1]  120.97,50.8 90 bottom
U$11  SFE_LOGO_NAME_FLAME.1_INCH  [SFE_LOGO_NAME_FLAME_.1]  100.65,124.21 90 bottom
U$12  SFE_LOGO_NAME_FLAME.1_INCH  [SFE_LOGO_NAME_FLAME_.1]  120.97,124.21 90 bottom
Y1  16MHZ  [RESONATOR-SMD]  13.97,33.53 135 top
Y2  16MHZ  [RESONATOR-SMD]  34.29,33.53 135 top
Y3  16MHZ  [RESONATOR-SMD]  13.97,106.93 135 top
Y4  16MHZ  [RESONATOR-SMD]  34.29,106.93 135 top
Y5  16MHZ  [RESONATOR-SMD]  54.61,33.53 135 top
Y6  16MHZ  [RESONATOR-SMD]  74.93,33.53 135 top
Y7  16MHZ  [RESONATOR-SMD]  54.61,106.93 135 top
Y8  16MHZ  [RESONATOR-SMD]  74.93,106.93 135 top
Y9  16MHZ  [RESONATOR-SMD]  95.25,33.53 135 top
Y10  16MHZ  [RESONATOR-SMD]  115.57,33.53 135 top
Y11  16MHZ  [RESONATOR-SMD]  95.25,106.93 135 top
Y12  16MHZ  [RESONATOR-SMD]  115.57,106.93 135 top

## Library data of the parts
C1-C8 C11-C15 C18-C24 C27-C33 C36-C42 C45-C51 C54-C60 C63-C69 C72-C78 C81-C87 C90-C96 C99-C105 C108 = SparkFun-Capacitors; PROD_ID: CAP-00810
C9 C16 C25 C34 C43 C52 C61 C70 C79 C88 C97 C106 = SparkFun-Capacitors; PROD_ID: CAP-00811
C10 C17 C26 C35 C44 C53 C62 C71 C80 C89 C98 C107 = SparkFun-Capacitors; PROD_ID: CAP-10790
D1 D4 D5 D8 D9 D12 D13 D16 D17 D20 D21 D24 D25 D28 D29 D32 D33 D36 D37 D40 D41 D44 D45 D48 = SparkFun-DiscreteSemi; PROD_ID: DIO-08053
D2 D6 D10 D14 D18 D22 D26 D30 D34 D38 D42 D46 = SparkFun-LED; PROD_ID: DIO-00819
D3 D7 D11 D15 D19 D23 D27 D31 D35 D39 D43 D47 = SparkFun-LED; PROD_ID: DIO-00821
E$1 = SparkFun-Retired
E$7 E$8 FID1-FID24 LOGO1-LOGO24 U$1-U$12 = SparkFun-Aesthetics
JP1-JP6 JP8-JP11 JP13-JP18 JP20-JP25 JP27-JP32 JP34-JP39 JP41-JP46 JP48-JP53 JP55-JP60 JP62-JP67 JP69-JP74 JP76-JP81 JP83 JP84 = SparkFun-Connectors
JP7 JP12 JP19 JP26 JP33 JP40 JP47 JP54 JP61 JP68 JP75 JP82 = SparkFun-Connectors; PROD_ID: CONN-09863; SKU: PRT-09914
L1-L12 = SparkFun-Passives; PROD_ID: NDUC-10789
Q1 Q3 Q5 Q7 Q9 Q11 Q13 Q15 Q17 Q19 Q21 Q23 = SparkFun-DiscreteSemi; PROD_ID: TRANS-11308
Q2 Q4 Q6 Q8 Q10 Q12 Q14 Q16 Q18 Q20 Q22 Q24 = SparkFun-DiscreteSemi; PROD_ID: TRANS-11151
R1 R9 R17 R25 R33 R41 R49 R57 R65 R73 R81 R89 = SparkFun-Resistors; PROD_ID: RES-07828
R2 R3 R7 R8 R10 R11 R15 R16 R18 R19 R23 R24 R26 R27 R31 R32 R34 R35 R39 R40 R42 R43 R47 R48 R50 R51 R55 R56 R58 R59 R63 R64 R66 R67 R71 R72 R74 R75 R79 R80 R82 R83 R87 R88 R90 R91 R95 R96 = SparkFun-Resistors; PROD_ID: RES-00824
R4 R12 R20 R28 R36 R44 R52 R60 R68 R76 R84 R92 = SparkFun-Resistors; PROD_ID: RES-00818
R5 R6 R13 R14 R21 R22 R29 R30 R37 R38 R45 R46 R53 R54 R61 R62 R69 R70 R77 R78 R85 R86 R93 R94 = SparkFun-Resistors; PROD_ID: RES-07856
S1-S12 = SparkFun-Electromechanical; FUNC: Reset; PROD_ID: SWCH-08247
U1 U6 U9 U12 U15 U18 U21 U24 U27 U30 U33 U36 = SparkFun-DigitalIC; PROD_ID: IC-11524
U2 U3 U7 U10 U13 U16 U19 U22 U25 U28 U31 U34 = SparkFun-DigitalIC; PROD_ID: IC-09069
U4 U5 U8 U11 U14 U17 U20 U23 U26 U29 U32 U35 = SparkFun-PowerIC; PROD_ID: IC-10787
Y1-Y12 = SparkFun-FreqCtrl; PROD_ID: XTAL-08900

## Nets
3.3V: C11.1 Q2.1 R8.2 U1.3 U1.13 U1.14
3.3V1: C18.1 Q4.1 R16.2 U6.3 U6.13 U6.14
3.3V2: C27.1 Q6.1 R24.2 U9.3 U9.13 U9.14
3.3V3: C36.1 Q8.1 R32.2 U12.3 U12.13 U12.14
3.3V4: C45.1 Q10.1 R40.2 U15.3 U15.13 U15.14
3.3V5: C54.1 Q12.1 R48.2 U18.3 U18.13 U18.14
3.3V6: C63.1 Q14.1 R56.2 U21.3 U21.13 U21.14
3.3V7: C72.1 Q16.1 R64.2 U24.3 U24.13 U24.14
3.3V8: C81.1 Q18.1 R72.2 U27.3 U27.13 U27.14
3.3V9: C90.1 Q20.1 R80.2 U30.3 U30.13 U30.14
3.3V10: C99.1 Q22.1 R88.2 U33.3 U33.13 U33.14
3.3V11: C108.1 Q24.1 R96.2 U36.3 U36.13 U36.14
A0: JP3.8 U2.23
A1: JP3.7 U2.24
A2: JP3.6 U2.25
A3: JP3.5 U2.26
A4: JP3.4 U2.27
A5: JP3.3 U2.28
A6: JP5.1 U2.19
A7: JP5.2 U2.22
A8: JP10.8 U3.23
A9: JP10.7 U3.24
A10: JP10.6 U3.25
A11: JP10.5 U3.26
A12: JP10.4 U3.27
A13: JP10.3 U3.28
A14: JP9.1 U3.19
A15: JP9.2 U3.22
A16: JP17.8 U7.23
A17: JP17.7 U7.24
A18: JP17.6 U7.25
A19: JP17.5 U7.26
A20: JP17.4 U7.27
A21: JP17.3 U7.28
A22: JP16.1 U7.19
A23: JP16.2 U7.22
A24: JP24.8 U10.23
A25: JP24.7 U10.24
A26: JP24.6 U10.25
A27: JP24.5 U10.26
A28: JP24.4 U10.27
A29: JP24.3 U10.28
A30: JP23.1 U10.19
A31: JP23.2 U10.22
A32: JP31.8 U13.23
A33: JP31.7 U13.24
A34: JP31.6 U13.25
A35: JP31.5 U13.26
A36: JP31.4 U13.27
A37: JP31.3 U13.28
A38: JP30.1 U13.19
A39: JP30.2 U13.22
A40: JP38.8 U16.23
A41: JP38.7 U16.24
A42: JP38.6 U16.25
A43: JP38.5 U16.26
A44: JP38.4 U16.27
A45: JP38.3 U16.28
A46: JP37.1 U16.19
A47: JP37.2 U16.22
A48: JP45.8 U19.23
A49: JP45.7 U19.24
A50: JP45.6 U19.25
A51: JP45.5 U19.26
A52: JP45.4 U19.27
A53: JP45.3 U19.28
A54: JP44.1 U19.19
A55: JP44.2 U19.22
A56: JP52.8 U22.23
A57: JP52.7 U22.24
A58: JP52.6 U22.25
A59: JP52.5 U22.26
A60: JP52.4 U22.27
A61: JP52.3 U22.28
A62: JP51.1 U22.19
A63: JP51.2 U22.22
A64: JP59.8 U25.23
A65: JP59.7 U25.24
A66: JP59.6 U25.25
A67: JP59.5 U25.26
A68: JP59.4 U25.27
A69: JP59.3 U25.28
A70: JP58.1 U25.19
A71: JP58.2 U25.22
A72: JP66.8 U28.23
A73: JP66.7 U28.24
A74: JP66.6 U28.25
A75: JP66.5 U28.26
A76: JP66.4 U28.27
A77: JP66.3 U28.28
A78: JP65.1 U28.19
A79: JP65.2 U28.22
A80: JP73.8 U31.23
A81: JP73.7 U31.24
A82: JP73.6 U31.25
A83: JP73.5 U31.26
A84: JP73.4 U31.27
A85: JP73.3 U31.28
A86: JP72.1 U31.19
A87: JP72.2 U31.22
A88: JP80.8 U34.23
A89: JP80.7 U34.24
A90: JP80.6 U34.25
A91: JP80.5 U34.26
A92: JP80.4 U34.27
A93: JP80.3 U34.28
A94: JP79.1 U34.19
A95: JP79.2 U34.22
AREF: C5.1 U2.20
AREF1: C12.1 U3.20
AREF2: C21.1 U7.20
AREF3: C30.1 U10.20
AREF4: C39.1 U13.20
AREF5: C48.1 U16.20
AREF6: C57.1 U19.20
AREF7: C66.1 U22.20
AREF8: C75.1 U25.20
AREF9: C84.1 U28.20
AREF10: C93.1 U31.20
AREF11: C102.1 U34.20
D1: JP11.8 U3.32
D2: JP2.8 U2.32
D3: JP2.7 U2.1
D4: JP2.6 U2.2
D5: JP2.5 U2.9
D6: JP2.4 U2.10
D7: JP2.3 U2.11
D8: JP2.2 U2.12
D9: JP2.1 U2.13
D10: JP3.12 U2.14
D11: JP11.7 U3.1
D12: JP11.6 U3.2
D13: JP11.5 U3.9
D14: JP11.4 U3.10
D15: JP11.3 U3.11
D16: JP11.2 U3.12
D17: JP11.1 U3.13
D18: JP10.12 U3.14
D19: JP18.8 U7.32
D20: JP18.7 U7.1
D21: JP18.6 U7.2
D22: JP18.5 U7.9
D23: JP18.4 U7.10
D24: JP18.3 U7.11
D25: JP18.2 U7.12
D26: JP18.1 U7.13
D27: JP17.12 U7.14
D28: JP25.8 U10.32
D29: JP25.7 U10.1
D30: JP25.6 U10.2
D31: JP25.5 U10.9
D32: JP25.4 U10.10
D33: JP25.3 U10.11
D34: JP25.2 U10.12
D35: JP25.1 U10.13
D36: JP24.12 U10.14
D37: JP32.8 U13.32
D38: JP32.7 U13.1
D39: JP32.6 U13.2
D40: JP32.5 U13.9
D41: JP32.4 U13.10
D42: JP32.3 U13.11
D43: JP32.2 U13.12
D44: JP32.1 U13.13
D45: JP31.12 U13.14
D46: JP39.8 U16.32
D47: JP39.7 U16.1
D48: JP39.6 U16.2
D49: JP39.5 U16.9
D50: JP39.4 U16.10
D51: JP39.3 U16.11
D52: JP39.2 U16.12
D53: JP39.1 U16.13
D54: JP38.12 U16.14
D55: JP46.8 U19.32
D56: JP46.7 U19.1
D57: JP46.6 U19.2
D58: JP46.5 U19.9
D59: JP46.4 U19.10
D60: JP46.3 U19.11
D61: JP46.2 U19.12
D62: JP46.1 U19.13
D63: JP45.12 U19.14
D64: JP53.8 U22.32
D65: JP53.7 U22.1
D66: JP53.6 U22.2
D67: JP53.5 U22.9
D68: JP53.4 U22.10
D69: JP53.3 U22.11
D70: JP53.2 U22.12
D71: JP53.1 U22.13
D72: JP52.12 U22.14
D73: JP60.8 U25.32
D74: JP60.7 U25.1
D75: JP60.6 U25.2
D76: JP60.5 U25.9
D77: JP60.4 U25.10
D78: JP60.3 U25.11
D79: JP60.2 U25.12
D80: JP60.1 U25.13
D81: JP59.12 U25.14
D82: JP67.8 U28.32
D83: JP67.7 U28.1
D84: JP67.6 U28.2
D85: JP67.5 U28.9
D86: JP67.4 U28.10
D87: JP67.3 U28.11
D88: JP67.2 U28.12
D89: JP67.1 U28.13
D90: JP66.12 U28.14
D91: JP74.8 U31.32
D92: JP74.7 U31.1
D93: JP74.6 U31.2
D94: JP74.5 U31.9
D95: JP74.4 U31.10
D96: JP74.3 U31.11
D97: JP74.2 U31.12
D98: JP74.1 U31.13
D99: JP73.12 U31.14
D100: JP81.8 U34.32
D101: JP81.7 U34.1
D102: JP81.6 U34.2
D103: JP81.5 U34.9
D104: JP81.4 U34.10
D105: JP81.3 U34.11
D106: JP81.2 U34.12
D107: JP81.1 U34.13
D108: JP80.12 U34.14
D+: JP1.USB_P U1.11
D+1: JP4.USB_P U6.11
D+2: JP15.USB_P U9.11
D+3: JP22.USB_P U12.11
D+4: JP29.USB_P U15.11
D+5: JP36.USB_P U18.11
D+6: JP43.USB_P U21.11
D+7: JP50.USB_P U24.11
D+8: JP57.USB_P U27.11
D+9: JP64.USB_P U30.11
D+10: JP71.USB_P U33.11
D+11: JP78.USB_P U36.11
D-: JP1.USB_M U1.12
D-1: JP4.USB_M U6.12
D-2: JP15.USB_M U9.12
D-3: JP22.USB_M U12.12
D-4: JP29.USB_M U15.12
D-5: JP36.USB_M U18.12
D-6: JP43.USB_M U21.12
D-7: JP50.USB_M U24.12
D-8: JP57.USB_M U27.12
D-9: JP64.USB_M U30.12
D-10: JP71.USB_M U33.12
D-11: JP78.USB_M U36.12
DTR: C4.1 Q2.3 R7.1
DTR1: C2.1 Q4.3 R15.1
DTR2: C20.1 Q6.3 R23.1
DTR3: C29.1 Q8.3 R31.1
DTR4: C38.1 Q10.3 R39.1
DTR5: C47.1 Q12.3 R47.1
DTR6: C56.1 Q14.3 R55.1
DTR7: C65.1 Q16.3 R63.1
DTR8: C74.1 Q18.3 R71.1
DTR9: C83.1 Q20.3 R79.1
DTR10: C92.1 Q22.3 R87.1
DTR11: C101.1 Q24.3 R95.1
GND: C3.2 C5.2 C6.2 C7.2 C8.2 C9.C C10.C C11.2 D2.C D3.C JP1.GND JP2.9 JP3.2 JP6.1 JP7.1 JP8.2 R1.1 S1.1 S1.2 U1.6 U1.16 U2.3 U2.5 U2.21 U4.4 Y1.2
GND1: C1.2 C12.2 C13.2 C14.2 C15.2 C16.C C17.C C18.2 D6.C D7.C JP4.GND JP10.2 JP11.9 JP12.1 JP13.1 JP14.2 R9.1 S2.1 S2.2 U3.3 U3.5 U3.21 U5.4 U6.6 U6.16 Y2.2
GND2: C19.2 C21.2 C22.2 C23.2 C24.2 C25.C C26.C C27.2 D10.C D11.C JP15.GND JP17.2 JP18.9 JP19.1 JP20.1 JP21.2 R17.1 S3.1 S3.2 U7.3 U7.5 U7.21 U8.4 U9.6 U9.16 Y3.2
GND3: C28.2 C30.2 C31.2 C32.2 C33.2 C34.C C35.C C36.2 D14.C D15.C JP22.GND JP24.2 JP25.9 JP26.1 JP27.1 JP28.2 R25.1 S4.1 S4.2 U10.3 U10.5 U10.21 U11.4 U12.6 U12.16 Y4.2
GND4: C37.2 C39.2 C40.2 C41.2 C42.2 C43.C C44.C C45.2 D18.C D19.C JP29.GND JP31.2 JP32.9 JP33.1 JP34.1 JP35.2 R33.1 S5.1 S5.2 U13.3 U13.5 U13.21 U14.4 U15.6 U15.16 Y5.2
GND5: C46.2 C48.2 C49.2 C50.2 C51.2 C52.C C53.C C54.2 D22.C D23.C JP36.GND JP38.2 JP39.9 JP40.1 JP41.1 JP42.2 R41.1 S6.1 S6.2 U16.3 U16.5 U16.21 U17.4 U18.6 U18.16 Y6.2
GND6: C55.2 C57.2 C58.2 C59.2 C60.2 C61.C C62.C C63.2 D26.C D27.C JP43.GND JP45.2 JP46.9 JP47.1 JP48.1 JP49.2 R49.1 S7.1 S7.2 U19.3 U19.5 U19.21 U20.4 U21.6 U21.16 Y7.2
GND7: C64.2 C66.2 C67.2 C68.2 C69.2 C70.C C71.C C72.2 D30.C D31.C JP50.GND JP52.2 JP53.9 JP54.1 JP55.1 JP56.2 R57.1 S8.1 S8.2 U22.3 U22.5 U22.21 U23.4 U24.6 U24.16 Y8.2
GND8: C73.2 C75.2 C76.2 C77.2 C78.2 C79.C C80.C C81.2 D34.C D35.C JP57.GND JP59.2 JP60.9 JP61.1 JP62.1 JP63.2 R65.1 S9.1 S9.2 U25.3 U25.5 U25.21 U26.4 U27.6 U27.16 Y9.2
GND9: C82.2 C84.2 C85.2 C86.2 C87.2 C88.C C89.C C90.2 D38.C D39.C JP64.GND JP66.2 JP67.9 JP68.1 JP69.1 JP70.2 R73.1 S10.1 S10.2 U28.3 U28.5 U28.21 U29.4 U30.6 U30.16 Y10.2
GND10: C91.2 C93.2 C94.2 C95.2 C96.2 C97.C C98.C C99.2 D42.C D43.C JP71.GND JP73.2 JP74.9 JP75.1 JP76.1 JP77.2 R81.1 S11.1 S11.2 U31.3 U31.5 U31.21 U32.4 U33.6 U33.16 Y11.2
GND11: C100.2 C102.2 C103.2 C104.2 C105.2 C106.C C107.C C108.2 D46.C D47.C JP78.GND JP80.2 JP81.9 JP82.1 JP83.1 JP84.2 R89.1 S12.1 S12.2 U34.3 U34.5 U34.21 U35.4 U36.6 U36.16 Y12.2
MISO: JP3.10 U2.16
MISO1: JP10.10 U3.16
MISO2: JP17.10 U7.16
MISO3: JP24.10 U10.16
MISO4: JP31.10 U13.16
MISO5: JP38.10 U16.16
MISO6: JP45.10 U19.16
MISO7: JP52.10 U22.16
MISO8: JP59.10 U25.16
MISO9: JP66.10 U28.16
MISO10: JP73.10 U31.16
MISO11: JP80.10 U34.16
MOSI: JP3.11 U2.15
MOSI1: JP10.11 U3.15
MOSI2: JP17.11 U7.15
MOSI3: JP24.11 U10.15
MOSI4: JP31.11 U13.15
MOSI5: JP38.11 U16.15
MOSI6: JP45.11 U19.15
MOSI7: JP52.11 U22.15
MOSI8: JP59.11 U25.15
MOSI9: JP66.11 U28.15
MOSI10: JP73.11 U31.15
MOSI11: JP80.11 U34.15
N$1: D3.A R4.1
N$2: D7.A R12.1
N$3: R5.1 U1.20
N$4: D2.A R2.1
N$5: U2.7 Y1.1
N$6: U2.8 Y1.3
N$7: R6.1 U1.4
N$8: D4.A L1.P$2 U4.5
N$11: Q2.2 R8.1 U1.1
N$12: U3.7 Y2.1
N$13: U3.8 Y2.3
N$14: R13.1 U6.20
N$15: R14.1 U6.4
N$16: D8.A L2.P$2 U5.5
N$17: D6.A R10.1
N$18: Q4.2 R16.1 U6.1
N$19: D11.A R20.1
N$20: U7.7 Y3.1
N$21: U7.8 Y3.3
N$22: R21.1 U9.20
N$23: R22.1 U9.4
N$24: D12.A L3.P$2 U8.5
N$25: D10.A R18.1
N$26: Q6.2 R24.1 U9.1
N$27: D15.A R28.1
N$28: U10.7 Y4.1
N$29: U10.8 Y4.3
N$30: R29.1 U12.20
N$31: R30.1 U12.4
N$32: D16.A L4.P$2 U11.5
N$33: D14.A R26.1
N$34: Q8.2 R32.1 U12.1
N$35: D19.A R36.1
N$36: U13.7 Y5.1
N$37: U13.8 Y5.3
N$38: R37.1 U15.20
N$39: R38.1 U15.4
N$40: D20.A L5.P$2 U14.5
N$41: D18.A R34.1
N$42: Q10.2 R40.1 U15.1
N$43: D23.A R44.1
N$44: U16.7 Y6.1
N$45: U16.8 Y6.3
N$46: R45.1 U18.20
N$47: R46.1 U18.4
N$48: D24.A L6.P$2 U17.5
N$49: D22.A R42.1
N$50: Q12.2 R48.1 U18.1
N$51: D27.A R52.1
N$52: U19.7 Y7.1
N$53: U19.8 Y7.3
N$54: R53.1 U21.20
N$55: R54.1 U21.4
N$56: D28.A L7.P$2 U20.5
N$57: D26.A R50.1
N$58: Q14.2 R56.1 U21.1
N$59: D31.A R60.1
N$60: U22.7 Y8.1
N$61: U22.8 Y8.3
N$62: R61.1 U24.20
N$63: R62.1 U24.4
N$64: D32.A L8.P$2 U23.5
N$65: D30.A R58.1
N$66: Q16.2 R64.1 U24.1
N$67: D35.A R68.1
N$68: U25.7 Y9.1
N$69: U25.8 Y9.3
N$70: R69.1 U27.20
N$71: R70.1 U27.4
N$72: D36.A L9.P$2 U26.5
N$73: D34.A R66.1
N$74: Q18.2 R72.1 U27.1
N$75: D39.A R76.1
N$76: U28.7 Y10.1
N$77: U28.8 Y10.3
N$78: R77.1 U30.20
N$79: R78.1 U30.4
N$80: D40.A L10.P$2 U29.5
N$81: D38.A R74.1
N$82: Q20.2 R80.1 U30.1
N$83: D43.A R84.1
N$84: U31.7 Y11.1
N$85: U31.8 Y11.3
N$86: R85.1 U33.20
N$87: R86.1 U33.4
N$88: D44.A L11.P$2 U32.5
N$89: D42.A R82.1
N$90: Q22.2 R88.1 U33.1
N$91: D47.A R92.1
N$92: U34.7 Y12.1
N$93: U34.8 Y12.3
N$94: R93.1 U36.20
N$95: R94.1 U36.4
N$96: D48.A L12.P$2 U35.5
N$97: D46.A R90.1
N$98: Q24.2 R96.1 U36.1
RESET: C4.2 JP2.10 R3.1 S1.3 S1.4 U2.29
RESET1: C2.2 JP11.10 R11.1 S2.3 S2.4 U3.29
RESET2: C20.2 JP18.10 R19.1 S3.3 S3.4 U7.29
RESET3: C29.2 JP25.10 R27.1 S4.3 S4.4 U10.29
RESET4: C38.2 JP32.10 R35.1 S5.3 S5.4 U13.29
RESET5: C47.2 JP39.10 R43.1 S6.3 S6.4 U16.29
RESET6: C56.2 JP46.10 R51.1 S7.3 S7.4 U19.29
RESET7: C65.2 JP53.10 R59.1 S8.3 S8.4 U22.29
RESET8: C74.2 JP60.10 R67.1 S9.3 S9.4 U25.29
RESET9: C83.2 JP67.10 R75.1 S10.3 S10.4 U28.29
RESET10: C92.2 JP74.10 R83.1 S11.3 S11.4 U31.29
RESET11: C101.2 JP81.10 R91.1 S12.3 S12.4 U34.29
RXI: JP2.11 JP8.4 R5.2 U2.30
RXI1: JP11.11 JP14.4 R13.2 U3.30
RXI2: JP18.11 JP21.4 R21.2 U7.30
RXI3: JP25.11 JP28.4 R29.2 U10.30
RXI4: JP32.11 JP35.4 R37.2 U13.30
RXI5: JP39.11 JP42.4 R45.2 U16.30
RXI6: JP46.11 JP49.4 R53.2 U19.30
RXI7: JP53.11 JP56.4 R61.2 U22.30
RXI8: JP60.11 JP63.4 R69.2 U25.30
RXI9: JP67.11 JP70.4 R77.2 U28.30
RXI10: JP74.11 JP77.4 R85.2 U31.30
RXI11: JP81.11 JP84.4 R93.2 U34.30
SCK: JP3.9 R4.2 U2.17
SCK1: JP10.9 R12.2 U3.17
SCK2: JP17.9 R20.2 U7.17
SCK3: JP24.9 R28.2 U10.17
SCK4: JP31.9 R36.2 U13.17
SCK5: JP38.9 R44.2 U16.17
SCK6: JP45.9 R52.2 U19.17
SCK7: JP52.9 R60.2 U22.17
SCK8: JP59.9 R68.2 U25.17
SCK9: JP66.9 R76.2 U28.17
SCK10: JP73.9 R84.2 U31.17
SCK11: JP80.9 R92.2 U34.17
TXO: JP2.12 JP8.3 R6.2 U2.31
TXO1: JP11.12 JP14.3 R14.2 U3.31
TXO2: JP18.12 JP21.3 R22.2 U7.31
TXO3: JP25.12 JP28.3 R30.2 U10.31
TXO4: JP32.12 JP35.3 R38.2 U13.31
TXO5: JP39.12 JP42.3 R46.2 U16.31
TXO6: JP46.12 JP49.3 R54.2 U19.31
TXO7: JP53.12 JP56.3 R62.2 U22.31
TXO8: JP60.12 JP63.3 R70.2 U25.31
TXO9: JP67.12 JP70.3 R78.2 U28.31
TXO10: JP74.12 JP77.3 R86.2 U31.31
TXO11: JP81.12 JP84.3 R94.2 U34.31
V_USB: C7.1 C8.1 D1.A JP1.5V Q1.1 R1.2 U1.15
V_USB1: C14.1 C15.1 D5.A JP4.5V Q3.1 R9.2 U6.15
V_USB2: C23.1 C24.1 D9.A JP15.5V Q5.1 R17.2 U9.15
V_USB3: C32.1 C33.1 D13.A JP22.5V Q7.1 R25.2 U12.15
V_USB4: C41.1 C42.1 D17.A JP29.5V Q9.1 R33.2 U15.15
V_USB5: C50.1 C51.1 D21.A JP36.5V Q11.1 R41.2 U18.15
V_USB6: C59.1 C60.1 D25.A JP43.5V Q13.1 R49.2 U21.15
V_USB7: C68.1 C69.1 D29.A JP50.5V Q15.1 R57.2 U24.15
V_USB8: C77.1 C78.1 D33.A JP57.5V Q17.1 R65.2 U27.15
V_USB9: C86.1 C87.1 D37.A JP64.5V Q19.1 R73.2 U30.15
V_USB10: C95.1 C96.1 D41.A JP71.5V Q21.1 R81.2 U33.15
V_USB11: C104.1 C105.1 D45.A JP78.5V Q23.1 R89.2 U36.15
VBAT: JP6.2 JP7.2 Q1.3
VBAT1: JP12.2 JP13.2 Q3.3
VBAT2: JP19.2 JP20.2 Q5.3
VBAT3: JP26.2 JP27.2 Q7.3
VBAT4: JP33.2 JP34.2 Q9.3
VBAT5: JP40.2 JP41.2 Q11.3
VBAT6: JP47.2 JP48.2 Q13.3
VBAT7: JP54.2 JP55.2 Q15.3
VBAT8: JP61.2 JP62.2 Q17.3
VBAT9: JP68.2 JP69.2 Q19.3
VBAT10: JP75.2 JP76.2 Q21.3
VBAT11: JP82.2 JP83.2 Q23.3
VCC: C3.1 C6.1 C10.A D4.C JP3.1 JP8.1 R2.2 R3.2 R7.2 U2.4 U2.6 U2.18 U4.1 U4.2
VCC1: C1.1 C13.1 C17.A D8.C JP10.1 JP14.1 R10.2 R11.2 R15.2 U3.4 U3.6 U3.18 U5.1 U5.2
VCC2: C19.1 C22.1 C26.A D12.C JP17.1 JP21.1 R18.2 R19.2 R23.2 U7.4 U7.6 U7.18 U8.1 U8.2
VCC3: C28.1 C31.1 C35.A D16.C JP24.1 JP28.1 R26.2 R27.2 R31.2 U10.4 U10.6 U10.18 U11.1 U11.2
VCC4: C37.1 C40.1 C44.A D20.C JP31.1 JP35.1 R34.2 R35.2 R39.2 U13.4 U13.6 U13.18 U14.1 U14.2
VCC5: C46.1 C49.1 C53.A D24.C JP38.1 JP42.1 R42.2 R43.2 R47.2 U16.4 U16.6 U16.18 U17.1 U17.2
VCC6: C55.1 C58.1 C62.A D28.C JP45.1 JP49.1 R50.2 R51.2 R55.2 U19.4 U19.6 U19.18 U20.1 U20.2
VCC7: C64.1 C67.1 C71.A D32.C JP52.1 JP56.1 R58.2 R59.2 R63.2 U22.4 U22.6 U22.18 U23.1 U23.2
VCC8: C73.1 C76.1 C80.A D36.C JP59.1 JP63.1 R66.2 R67.2 R71.2 U25.4 U25.6 U25.18 U26.1 U26.2
VCC9: C82.1 C85.1 C89.A D40.C JP66.1 JP70.1 R74.2 R75.2 R79.2 U28.4 U28.6 U28.18 U29.1 U29.2
VCC10: C91.1 C94.1 C98.A D44.C JP73.1 JP77.1 R82.2 R83.2 R87.2 U31.4 U31.6 U31.18 U32.1 U32.2
VCC11: C100.1 C103.1 C107.A D48.C JP80.1 JP84.1 R90.2 R91.2 R95.2 U34.4 U34.6 U34.18 U35.1 U35.2
VCC_1: C9.A D1.C L1.P$1 Q1.2
VCC_2: C16.A D5.C L2.P$1 Q3.2
VCC_3: C25.A D9.C L3.P$1 Q5.2
VCC_4: C34.A D13.C L4.P$1 Q7.2
VCC_5: C43.A D17.C L5.P$1 Q9.2
VCC_6: C52.A D21.C L6.P$1 Q11.2
VCC_7: C61.A D25.C L7.P$1 Q13.2
VCC_8: C70.A D29.C L8.P$1 Q15.2
VCC_9: C79.A D33.C L9.P$1 Q17.2
VCC_10: C88.A D37.C L10.P$1 Q19.2
VCC_11: C97.A D41.C L11.P$1 Q21.2
VCC_12: C106.A D45.C L12.P$1 Q23.2

## Tracks (layer width: path | path; a pad name or v marks a point on that pad's centre or on a via)
3.3V
  Top 0.254: 17.08,59.69 19.05,59.69 19.77,60.41 C11.1 R8.2 22.26,60.45 22.23,60.45 22.72,59.96 Q2.1 | 17.02,60.78 U1.13 17.08,59.69 | 16.51,60.78 U1.14 16.45,59.69 | 16.45,59.69 16.45,59.37 15.49,58.42 14.48,58.42 13.97,57.91 13.97,55.55 U1.3 | 17.08,59.69 16.45,59.69
3.3V1
  Top 0.254: 37.4,59.69 39.37,59.69 40.09,60.41 C18.1 R16.2 42.58,60.45 42.55,60.45 43.04,59.96 Q4.1 | 37.34,60.78 U6.13 37.4,59.69 | 36.83,60.78 U6.14 36.77,59.69 | 36.77,59.69 36.77,59.37 35.81,58.42 34.8,58.42 34.29,57.91 34.29,55.55 U6.3 | 37.4,59.69 36.77,59.69
3.3V2
  Top 0.254: 17.08,133.1 19.05,133.1 19.77,133.82 C27.1 R24.2 22.26,133.86 22.23,133.86 22.72,133.37 Q6.1 | 17.02,134.19 U9.13 17.08,133.1 | 16.51,134.19 U9.14 16.45,133.1 | 16.45,133.1 16.45,132.78 15.49,131.83 14.48,131.83 13.97,131.32 13.97,128.96 U9.3 | 17.08,133.1 16.45,133.1
3.3V3
  Top 0.254: 37.4,133.1 39.37,133.1 40.09,133.82 C36.1 R32.2 42.58,133.86 42.55,133.86 43.04,133.37 Q8.1 | 37.34,134.19 U12.13 37.4,133.1 | 36.83,134.19 U12.14 36.77,133.1 | 36.77,133.1 36.77,132.78 35.81,131.83 34.8,131.83 34.29,131.32 34.29,128.96 U12.3 | 37.4,133.1 36.77,133.1
3.3V4
  Top 0.254: 57.72,59.69 59.69,59.69 60.41,60.41 C45.1 R40.2 62.9,60.45 62.87,60.45 63.36,59.96 Q10.1 | 57.66,60.78 U15.13 57.72,59.69 | 57.15,60.78 U15.14 57.09,59.69 | 57.09,59.69 57.09,59.37 56.13,58.42 55.12,58.42 54.61,57.91 54.61,55.55 U15.3 | 57.72,59.69 57.09,59.69
3.3V5
  Top 0.254: 78.04,59.69 80.01,59.69 80.73,60.41 C54.1 R48.2 83.22,60.45 83.19,60.45 83.68,59.96 Q12.1 | 77.98,60.78 U18.13 78.04,59.69 | 77.47,60.78 U18.14 77.41,59.69 | 77.41,59.69 77.41,59.37 76.45,58.42 75.44,58.42 74.93,57.91 74.93,55.55 U18.3 | 78.04,59.69 77.41,59.69
3.3V6
  Top 0.254: 57.72,133.1 59.69,133.1 60.41,133.82 C63.1 R56.2 62.9,133.86 62.87,133.86 63.36,133.37 Q14.1 | 57.66,134.19 U21.13 57.72,133.1 | 57.15,134.19 U21.14 57.09,133.1 | 57.09,133.1 57.09,132.78 56.13,131.83 55.12,131.83 54.61,131.32 54.61,128.96 U21.3 | 57.72,133.1 57.09,133.1
3.3V7
  Top 0.254: 78.04,133.1 80.01,133.1 80.73,133.82 C72.1 R64.2 83.22,133.86 83.19,133.86 83.68,133.37 Q16.1 | 77.98,134.19 U24.13 78.04,133.1 | 77.47,134.19 U24.14 77.41,133.1 | 77.41,133.1 77.41,132.78 76.45,131.83 75.44,131.83 74.93,131.32 74.93,128.96 U24.3 | 78.04,133.1 77.41,133.1
3.3V8
  Top 0.254: 98.36,59.69 100.33,59.69 101.05,60.41 C81.1 R72.2 103.54,60.45 103.5,60.45 104,59.96 Q18.1 | 98.3,60.78 U27.13 98.36,59.69 | 97.79,60.78 U27.14 97.73,59.69 | 97.73,59.69 97.73,59.37 96.77,58.42 95.76,58.42 95.25,57.91 95.25,55.55 U27.3 | 98.36,59.69 97.73,59.69
3.3V9
  Top 0.254: 118.68,59.69 120.65,59.69 121.37,60.41 C90.1 R80.2 123.86,60.45 123.83,60.45 124.32,59.96 Q20.1 | 118.62,60.78 U30.13 118.68,59.69 | 118.11,60.78 U30.14 118.05,59.69 | 118.05,59.69 118.05,59.37 117.09,58.42 116.08,58.42 115.57,57.91 115.57,55.55 U30.3 | 118.68,59.69 118.05,59.69
3.3V10
  Top 0.254: 98.36,133.1 100.33,133.1 101.05,133.82 C99.1 R88.2 103.54,133.86 103.5,133.86 104,133.37 Q22.1 | 98.3,134.19 U33.13 98.36,133.1 | 97.79,134.19 U33.14 97.73,133.1 | 97.73,133.1 97.73,132.78 96.77,131.83 95.76,131.83 95.25,131.32 95.25,128.96 U33.3 | 98.36,133.1 97.73,133.1
3.3V11
  Top 0.254: 118.68,133.1 120.65,133.1 121.37,133.82 C108.1 R96.2 123.86,133.86 123.83,133.86 124.32,133.37 Q24.1 | 118.62,134.19 U36.13 118.68,133.1 | 118.11,134.19 U36.14 118.05,133.1 | 118.05,133.1 118.05,132.78 117.09,131.83 116.08,131.83 115.57,131.32 115.57,128.96 U36.3 | 118.68,133.1 118.05,133.1
A0
  Top 0.254: U2.23 22.89,23.62 23.62,23.62 24.13,23.11 24.13,22.61 24.38,22.35 24.38,21.72 JP3.8
A1
  Top 0.254: U2.24 23.52,24.13 24.77,24.13 JP3.7
A2
  Top 0.254: JP3.6 25.15,25.91 24.13,26.92 24.13,27.69 23.88,27.94 23.62,27.94 22.8,27.11 U2.25
A3
  Top 0.254: JP3.5 23.11,28.45 22.23,27.56 U2.26
A4
  Top 0.254: JP3.4 25.15,30.99 25.15,30.23 23.88,28.96 22.52,28.96 U2.27
A5
  Top 0.254: JP3.3 25.4,33.53 25.4,33.02 23.88,31.5 23.88,29.72 23.62,29.46 21.9,29.46 U2.28
A6  (via drill 0.25)
  Top 0.254: v20.07,17.27 20.57,17.78 20.57,21.42 U2.19
  Bottom 0.254: v20.07,17.27 21.34,17.27 21.59,17.02 21.59,14.48 JP5.1
A7  (via drill 0.25)
  Top 0.254: U2.22 22.65,22.73 v23.24,22.73
  Bottom 0.254: v23.24,22.73 23.24,19.05 23.5,18.8 23.5,16.38 JP5.2
A8
  Top 0.254: U3.23 43.21,23.62 43.94,23.62 44.45,23.11 44.45,22.61 44.7,22.35 44.7,21.72 JP10.8
A9
  Top 0.254: U3.24 43.84,24.13 45.09,24.13 JP10.7
A10
  Top 0.254: JP10.6 45.47,25.91 44.45,26.92 44.45,27.69 44.2,27.94 43.94,27.94 43.12,27.11 U3.25
A11
  Top 0.254: JP10.5 43.43,28.45 42.55,27.56 U3.26
A12
  Top 0.254: JP10.4 45.47,30.99 45.47,30.23 44.2,28.96 42.84,28.96 U3.27
A13
  Top 0.254: JP10.3 45.72,33.53 45.72,33.02 44.2,31.5 44.2,29.72 43.94,29.46 42.22,29.46 U3.28
A14  (via drill 0.25)
  Top 0.254: v40.39,17.27 40.89,17.78 40.89,21.42 U3.19
  Bottom 0.254: v40.39,17.27 41.66,17.27 41.91,17.02 41.91,14.48 JP9.1
A15  (via drill 0.25)
  Top 0.254: U3.22 42.97,22.73 v43.56,22.73
  Bottom 0.254: v43.56,22.73 43.56,19.05 43.81,18.8 43.81,16.38 JP9.2
A16
  Top 0.254: U7.23 22.89,97.03 23.62,97.03 24.13,96.52 24.13,96.01 24.38,95.76 24.38,95.12 JP17.8
A17
  Top 0.254: U7.24 23.52,97.54 24.77,97.54 JP17.7
A18
  Top 0.254: JP17.6 25.15,99.31 24.13,100.33 24.13,101.09 23.88,101.35 23.62,101.35 22.8,100.52 U7.25
A19
  Top 0.254: JP17.5 23.11,101.85 22.23,100.97 U7.26
A20
  Top 0.254: JP17.4 25.15,104.39 25.15,103.63 23.88,102.36 22.52,102.36 U7.27
A21
  Top 0.254: JP17.3 25.4,106.93 25.4,106.43 23.88,104.9 23.88,103.12 23.62,102.87 21.9,102.87 U7.28
A22  (via drill 0.25)
  Top 0.254: v20.07,90.68 20.57,91.19 20.57,94.82 U7.19
  Bottom 0.254: v20.07,90.68 21.34,90.68 21.59,90.42 21.59,87.88 JP16.1
A23  (via drill 0.25)
  Top 0.254: U7.22 22.65,96.14 v23.24,96.14
  Bottom 0.254: v23.24,96.14 23.24,92.46 23.5,92.2 23.5,89.79 JP16.2
A24
  Top 0.254: U10.23 43.21,97.03 43.94,97.03 44.45,96.52 44.45,96.01 44.7,95.76 44.7,95.12 JP24.8
A25
  Top 0.254: U10.24 43.84,97.54 45.09,97.54 JP24.7
A26
  Top 0.254: JP24.6 45.47,99.31 44.45,100.33 44.45,101.09 44.2,101.35 43.94,101.35 43.12,100.52 U10.25
A27
  Top 0.254: JP24.5 43.43,101.85 42.55,100.97 U10.26
A28
  Top 0.254: JP24.4 45.47,104.39 45.47,103.63 44.2,102.36 42.84,102.36 U10.27
A29
  Top 0.254: JP24.3 45.72,106.93 45.72,106.43 44.2,104.9 44.2,103.12 43.94,102.87 42.22,102.87 U10.28
A30  (via drill 0.25)
  Top 0.254: v40.39,90.68 40.89,91.19 40.89,94.82 U10.19
  Bottom 0.254: v40.39,90.68 41.66,90.68 41.91,90.42 41.91,87.88 JP23.1
A31  (via drill 0.25)
  Top 0.254: U10.22 42.97,96.14 v43.56,96.14
  Bottom 0.254: v43.56,96.14 43.56,92.46 43.81,92.2 43.81,89.79 JP23.2
A32
  Top 0.254: U13.23 63.53,23.62 64.26,23.62 64.77,23.11 64.77,22.61 65.02,22.35 65.02,21.72 JP31.8
A33
  Top 0.254: U13.24 64.16,24.13 65.41,24.13 JP31.7